# Altium PCB ETBC.PcbDoc
Units mil, origin at the board's own origin, x right, y up, seen from the top; angles counter-clockwise.
Board outline 2500 x 2500 mil, 4 copper layers (Top Copper, Plane (GND), Plane (+3V3), Bottom Copper), stack 61.811 mil thick; 104 components, 64 nets, 325 pads, 103 vias.
Unrouted connection lines stored in the file: 2.
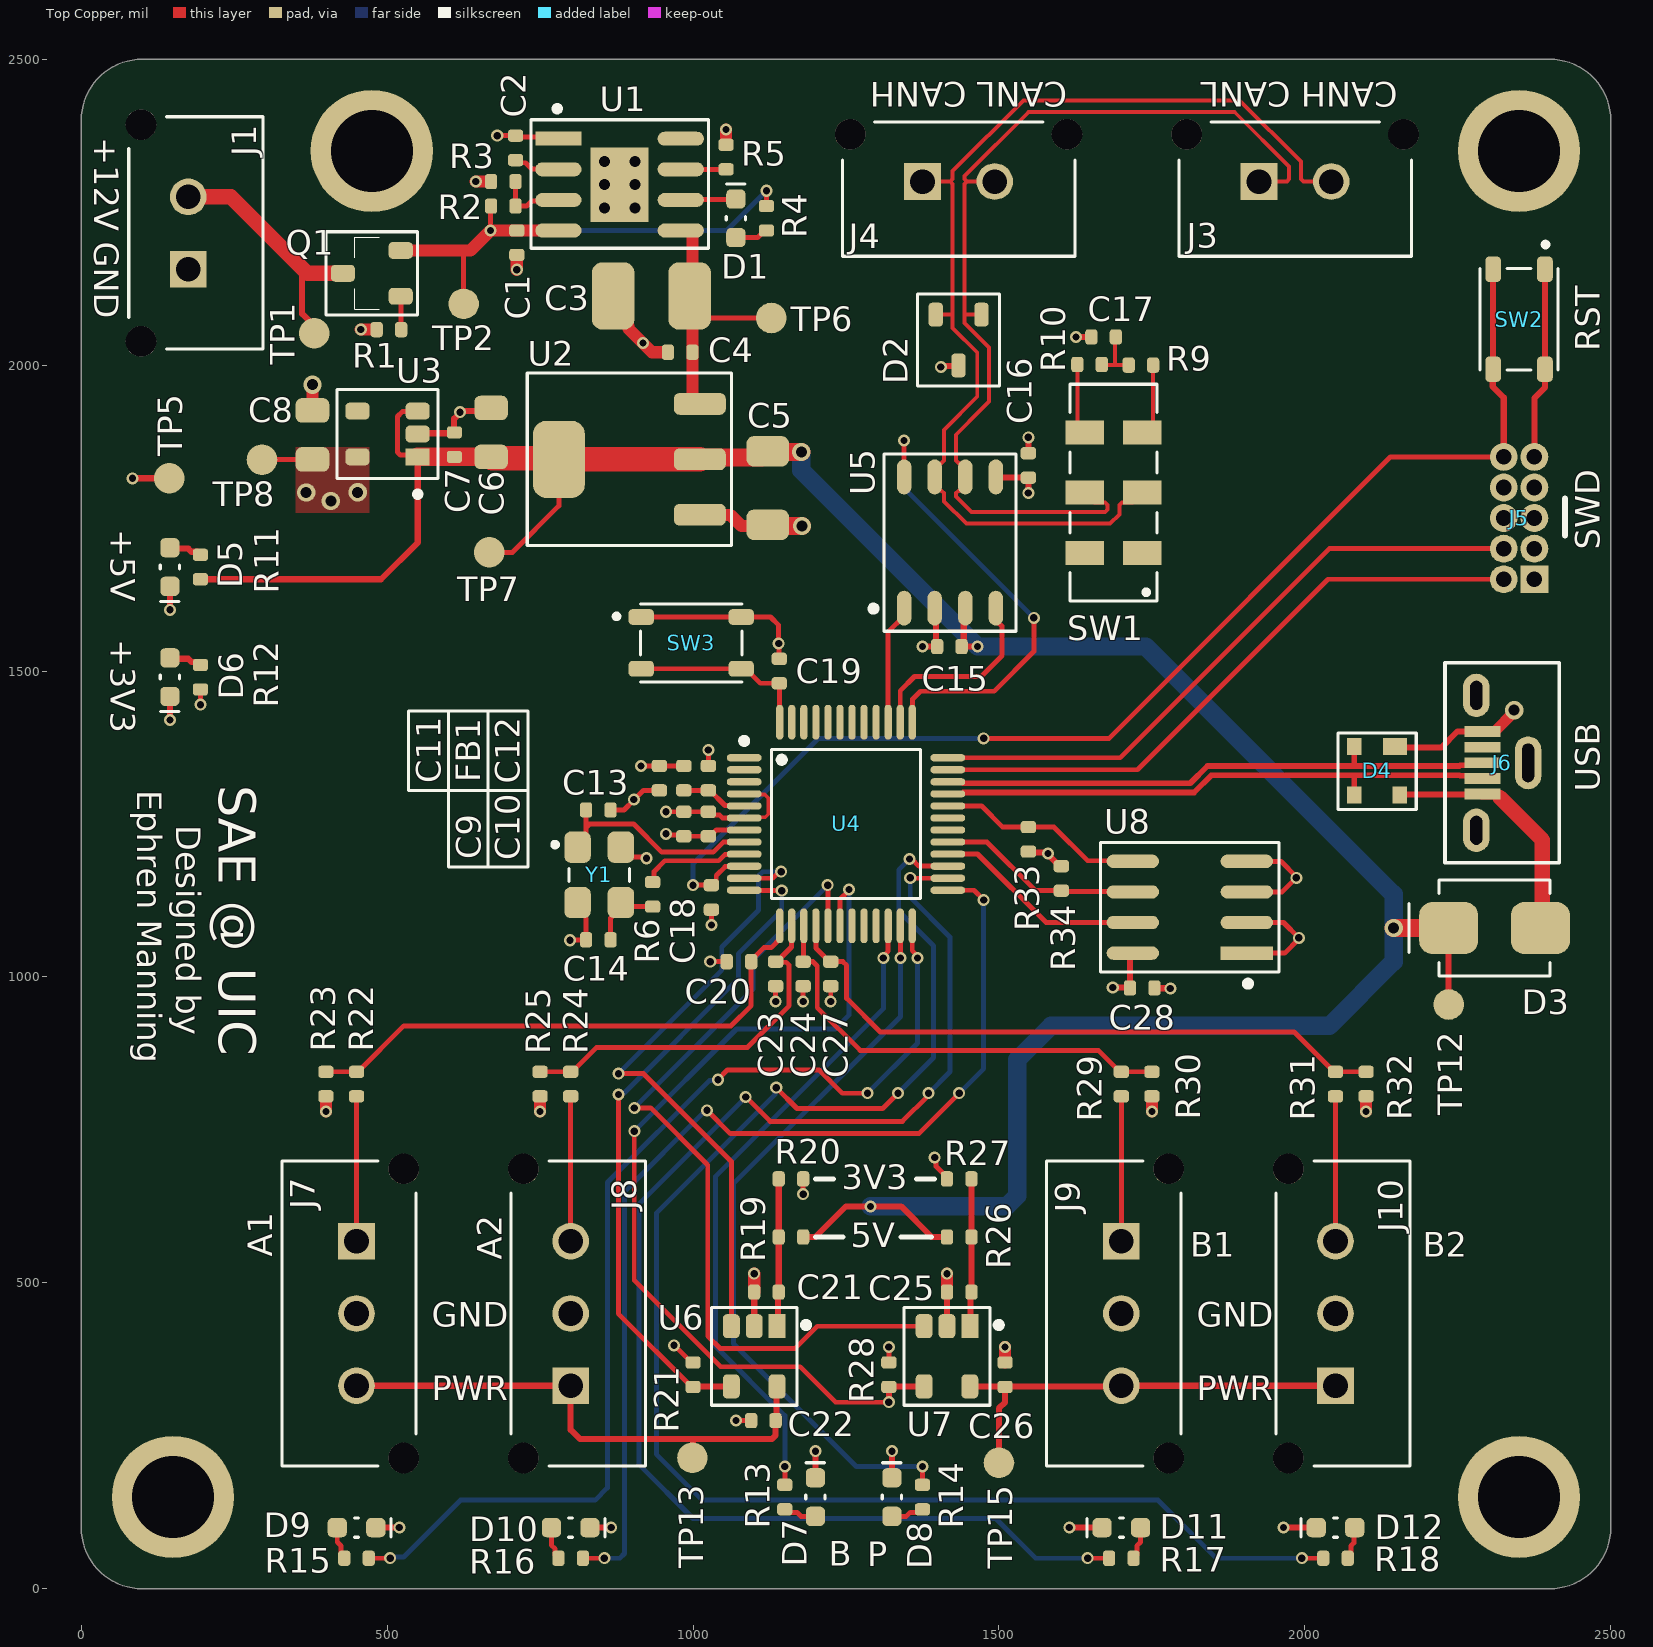
[diagram p0: Top Copper view]
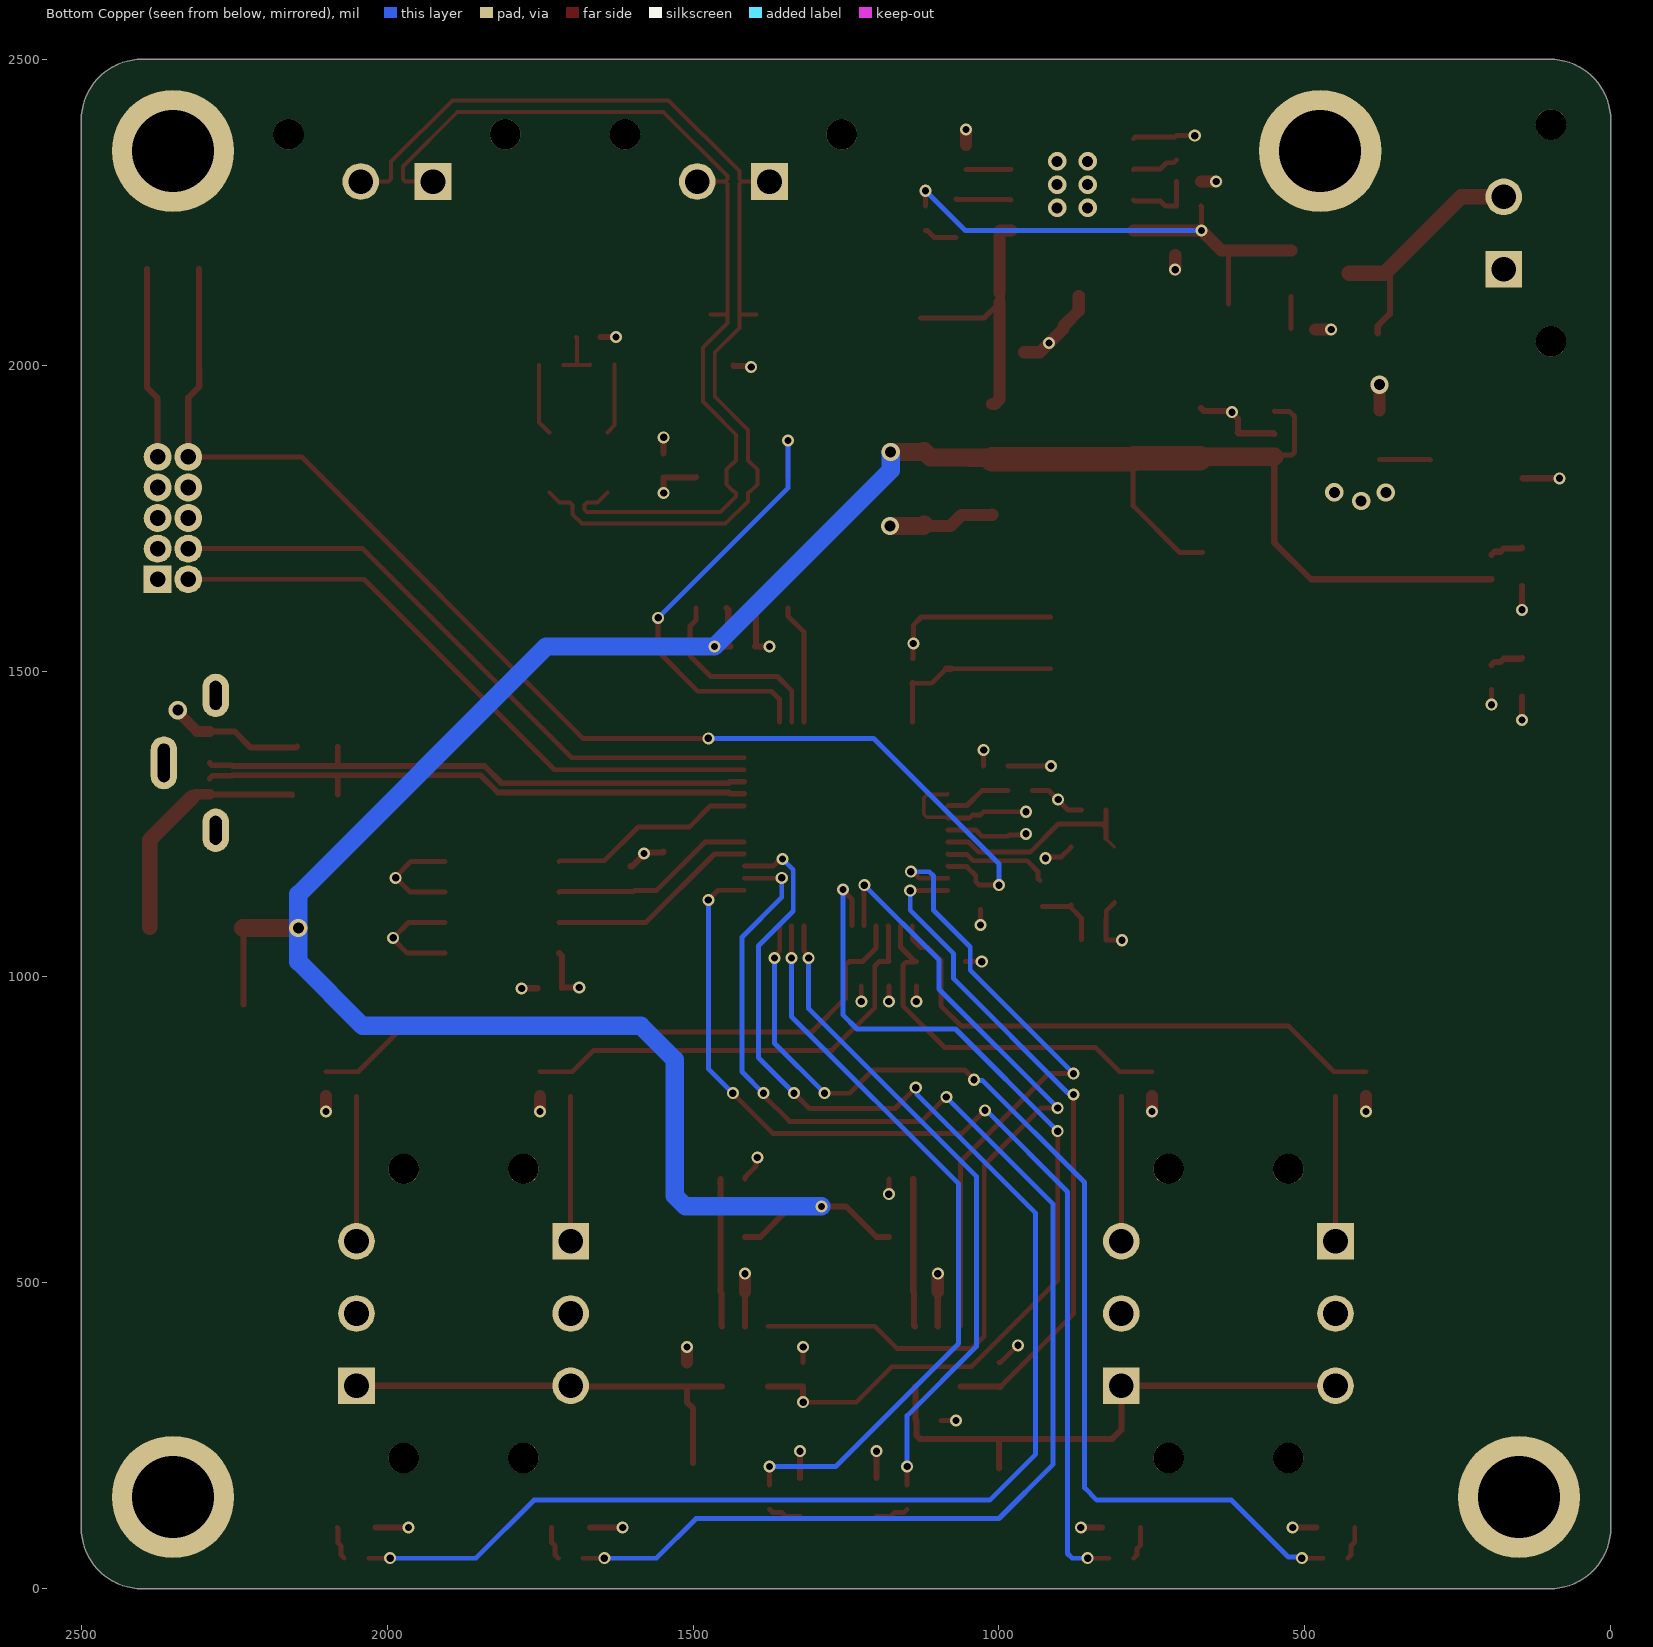
[diagram p1: Bottom Copper view, seen from below]
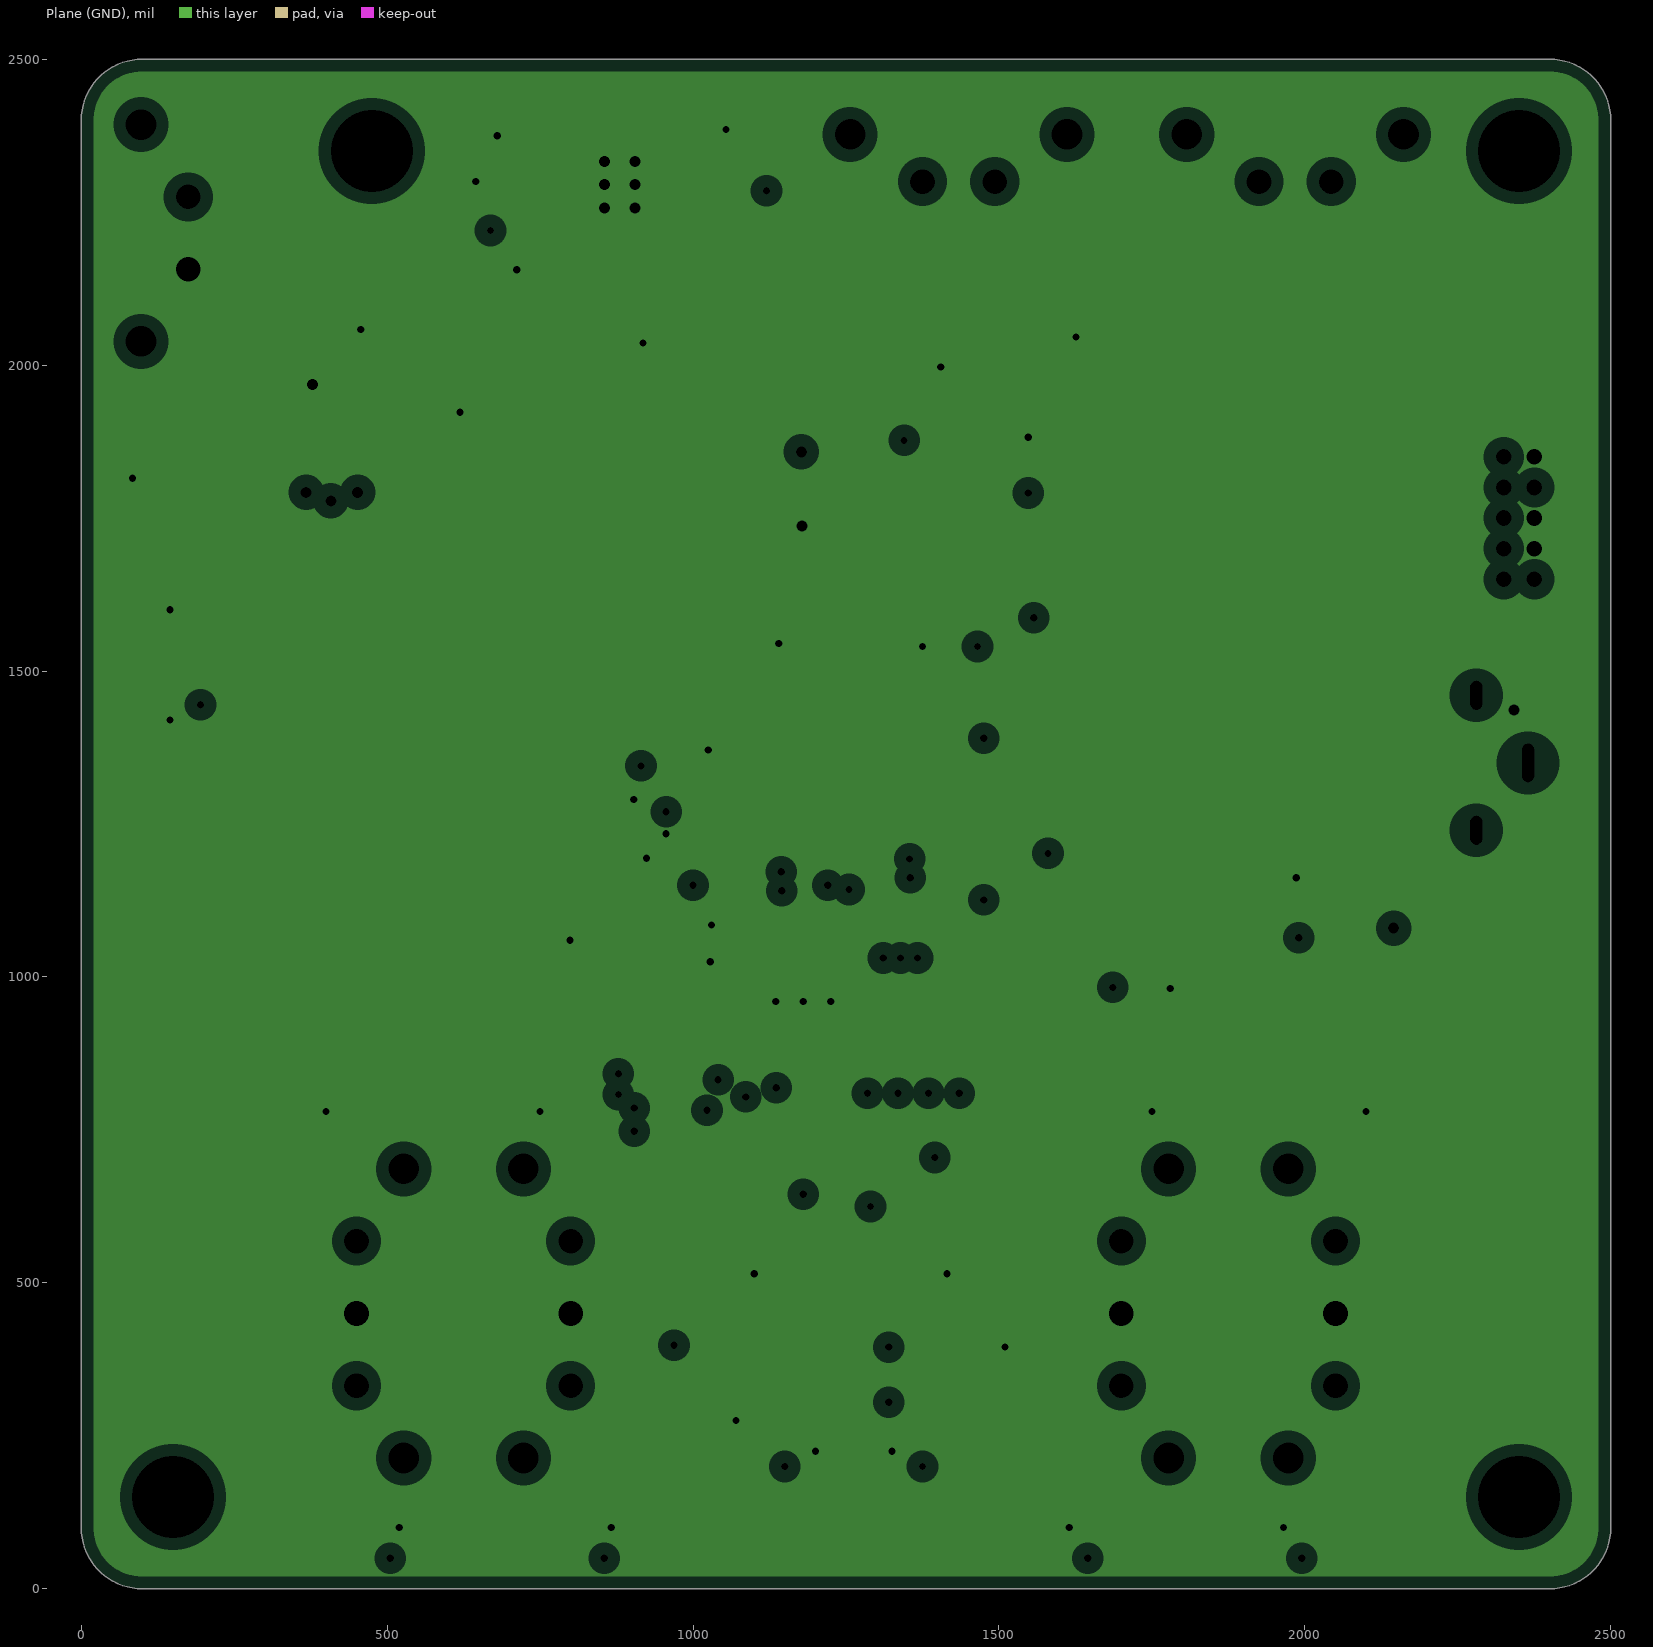
[diagram p2: Plane (GND), clearances drawn from the general rule]
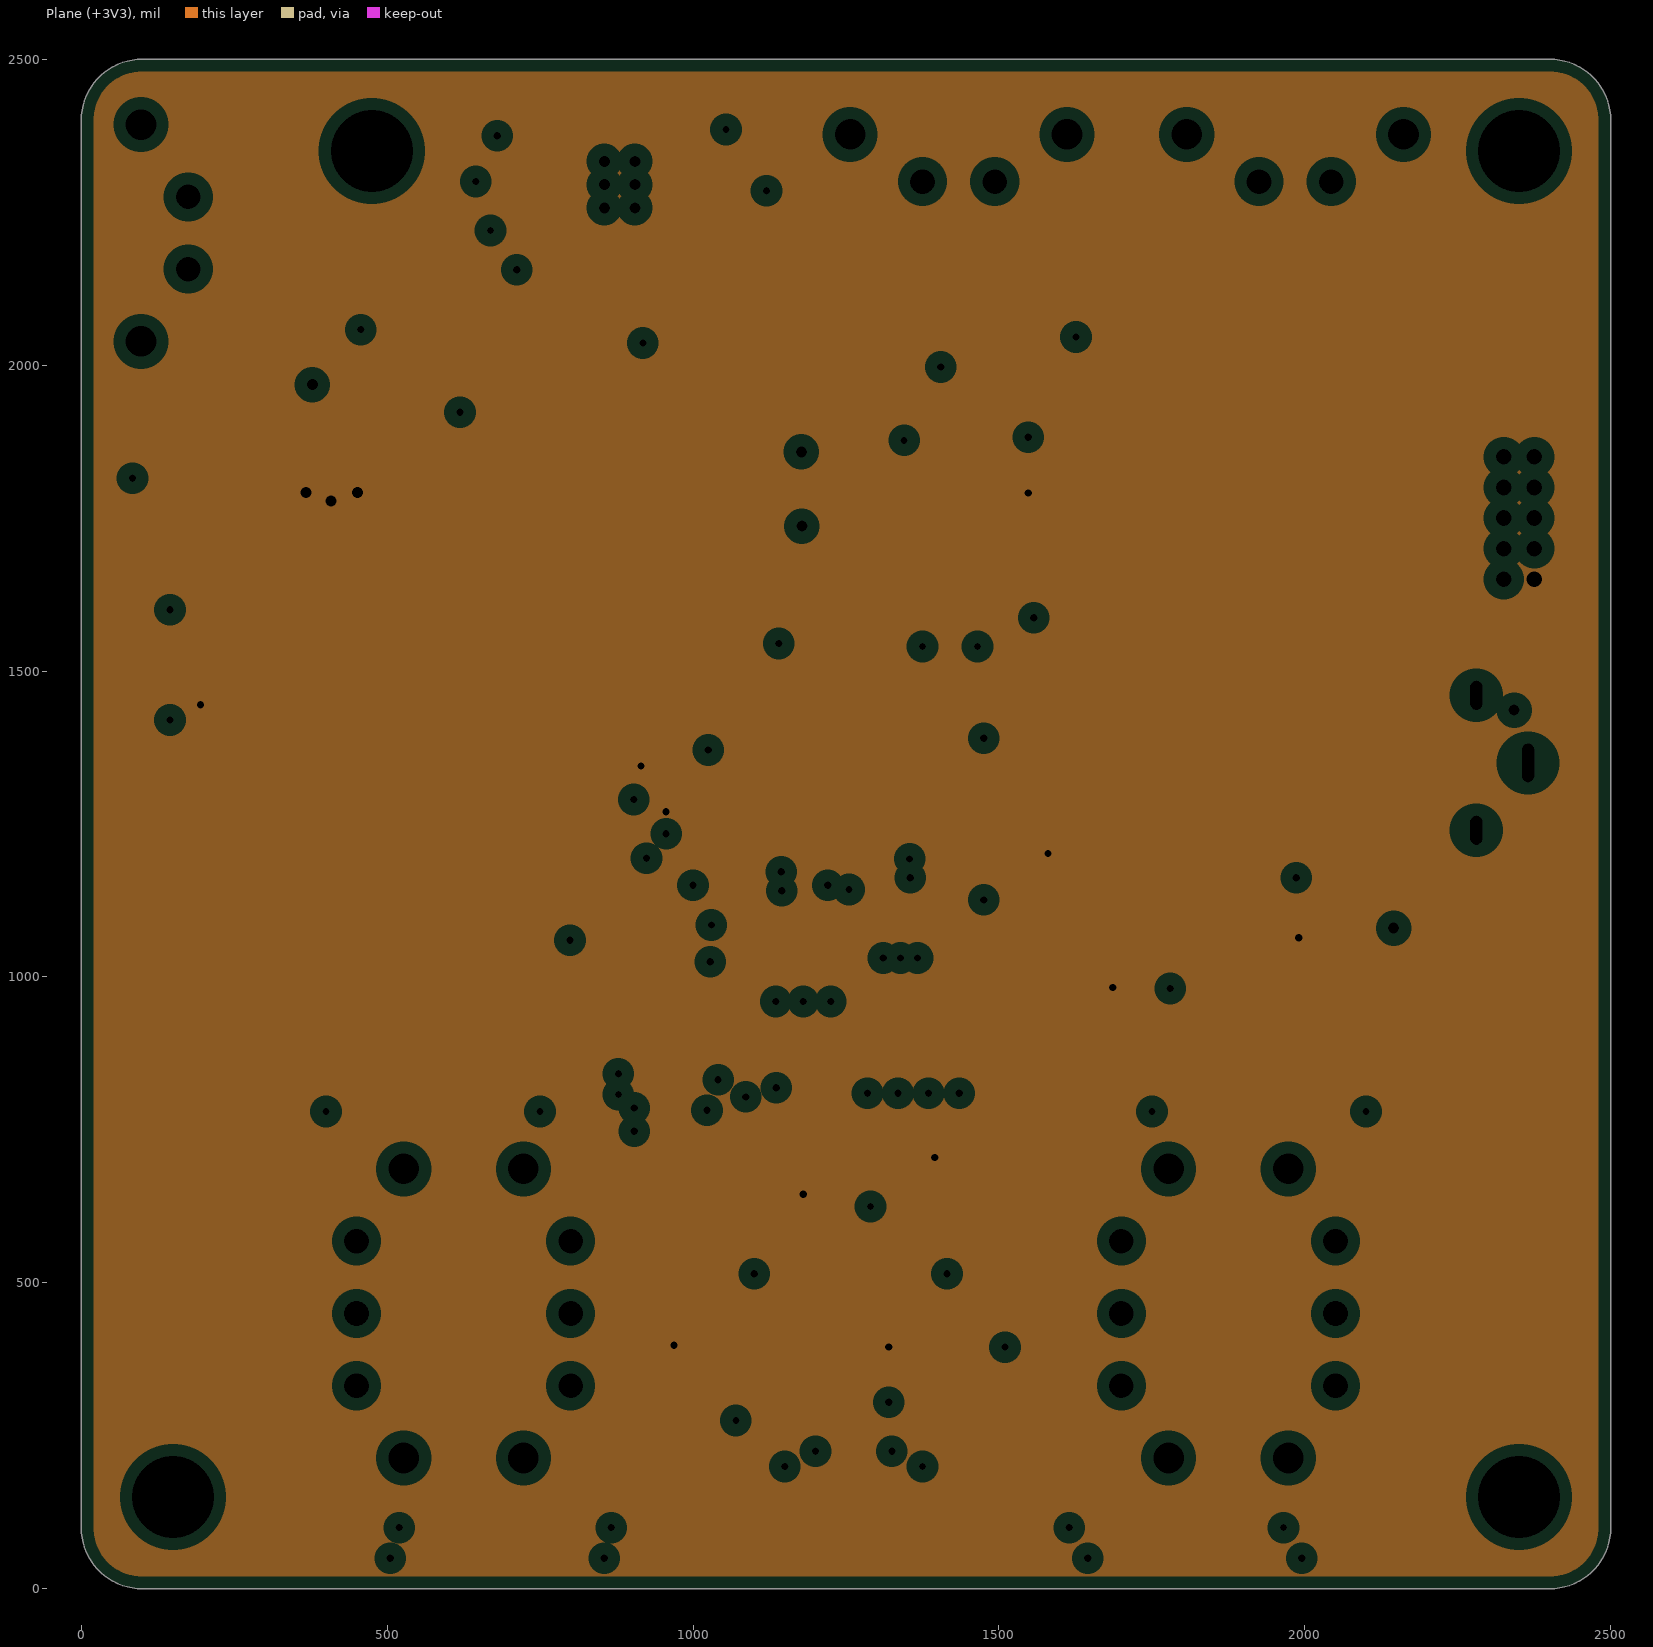
[diagram p3: Plane (+3V3), clearances drawn from the general rule]
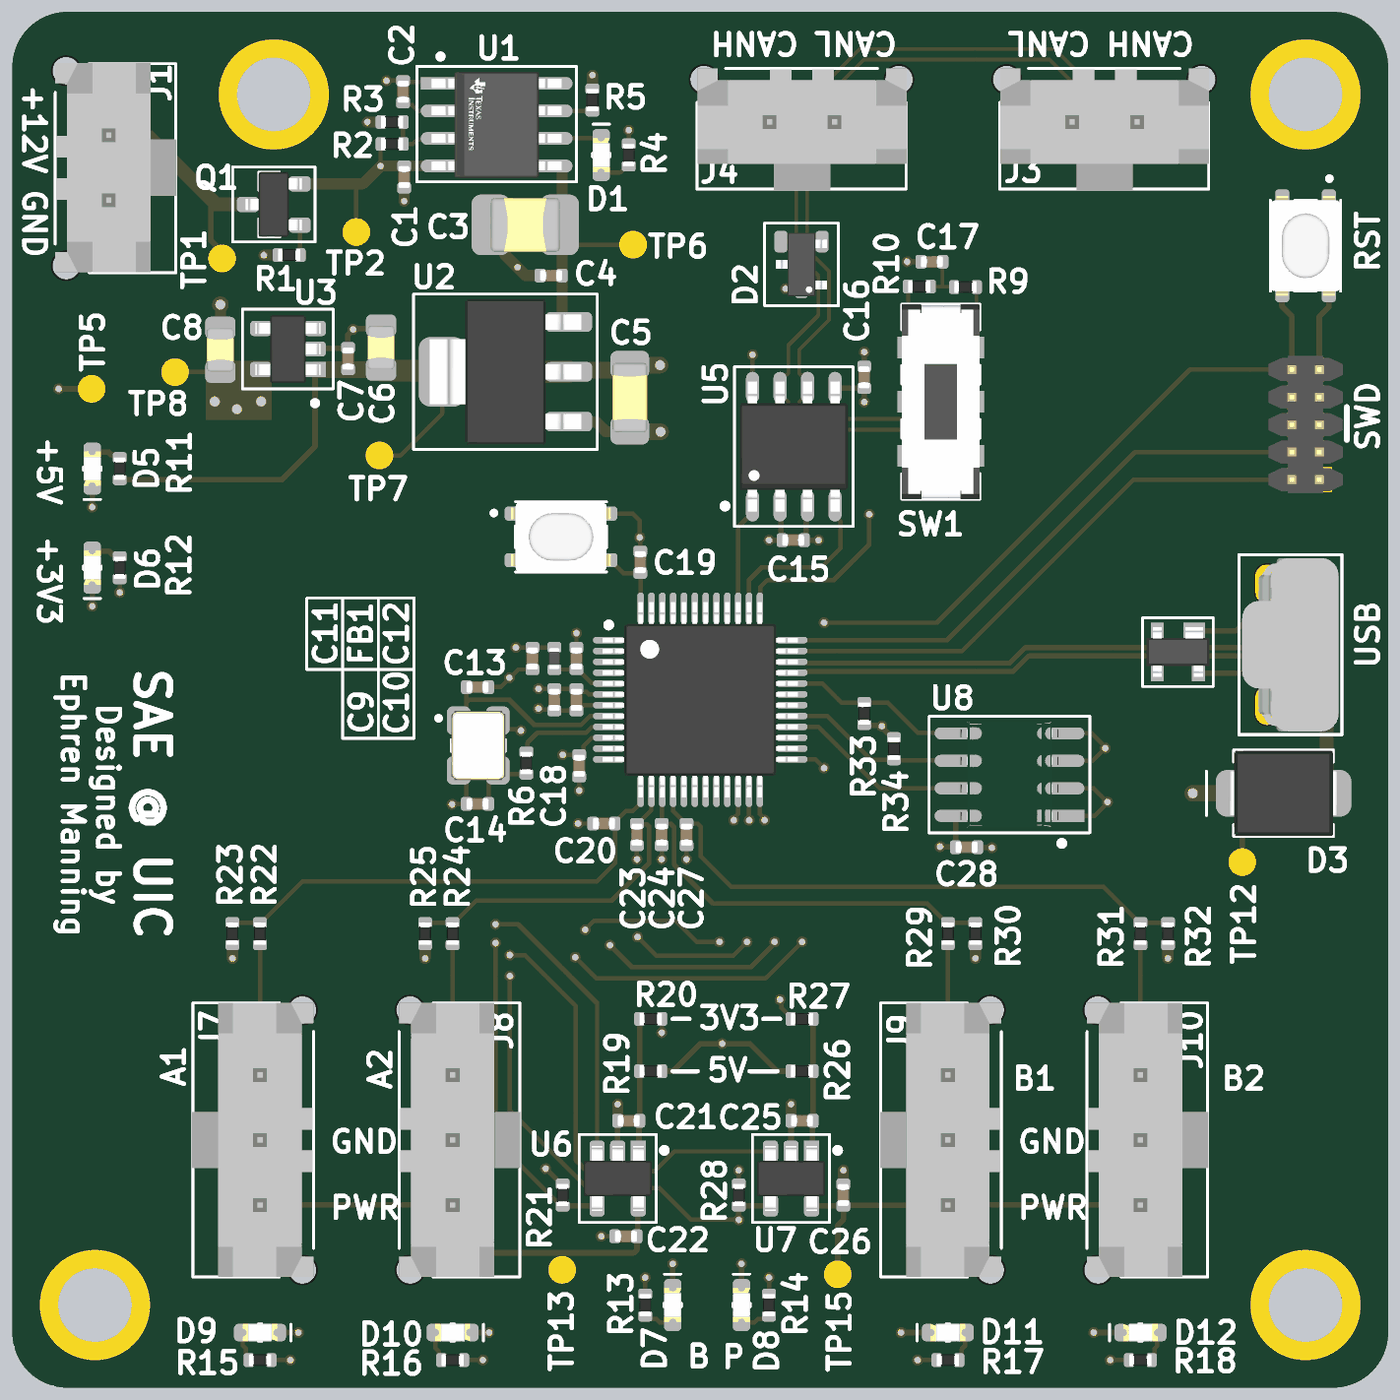
[diagram p4: 3D render of the assembled board from above, using the file's embedded part models]

## Layer stack, top to bottom
Top Mask: solder mask 0.591, Solder Resist, Dk 3.8
Top Copper: signal copper 1.378
Dielectric 1: prepreg 7.874, 7628, Dk 4.6
Plane (GND): plane copper 0.689, net GND
Core: core 41.929, FR-4, Dk 4.5
Plane (+3V3): plane copper 0.689, net +3V3
Dielectric 2: prepreg 7.874, 7628, Dk 4.6
Bottom Copper: signal copper 1.378
Bottom Mask: solder mask 0.591, Solder Resist, Dk 3.8

## Board outline
0,100 0,2400 cw(c100,2400) 100,2500 2400,2500 cw(c2400,2400) 2500,2400 2500,100 cw(c2400,100) 2400,0 100,0 cw(c100,100)

## Design rules (kind name [scope] priority, off if disabled: settings)
BoardOutlineClearance [All] p1: gap=7.87 ignorepadtopadclearanceinfootprint=FALSE except(15.75: Arc-SplitBarrior Arc-SplitContinuation Track-SplitBarrior Track-SplitContinuation SMDPad-SplitBarrior SMDPad-SplitContinuation THPad-SplitBarrior THPad-SplitContinuation Via-SplitBarrior Via-SplitContinuation Fill-SplitBarrior Fill-SplitContinuation Poly-SplitBarrior Poly-SplitContinuation Region-SplitBarrior Region-SplitContinuation Text-SplitBarrior Text-SplitContinuation)
Clearance [All] p1: gap=7.87 ignorepadtopadclearanceinfootprint=TRUE except(3.5: Arc-Arc Arc-Track Arc-SMDPad Track-Track Track-SMDPad SMDPad-SMDPad; 5: Arc-Via Track-Via SMDPad-Via THPad-Via Via-Via; 7: SMDPad-Fill SMDPad-Poly SMDPad-Region; 10: Arc-Text Track-Text SMDPad-Text THPad-Text Via-Text Fill-Text Poly-Text Region-Text Text-Text)
DiffPairsRouting DiffPairsRouting-USB [InDifferentialPair('USB')] p1: maxlimit=6 minlimit=6 mostfreqgap=6 toplayer_minwidth=9.23 toplayer_maxwidth=9.23 toplayer_prefwidth=9.23 bottomlayer_minwidth=9.23 bottomlayer_maxwidth=9.23 bottomlayer_prefwidth=9.23 impedanceprofiledriven=TRUE impedanceprofileid={FC7DA129-174D-4E2E-97C5-71684891E912} impedanceprofilevalue=90.000000 maxuncoupledlength=500
DiffPairsRouting DiffPairsRouting-CAN [InDifferentialPairClass('All Differential Pairs')] p2: maxlimit=13 minlimit=13 mostfreqgap=13 toplayer_minwidth=6.5 toplayer_maxwidth=6.5 toplayer_prefwidth=6.5 bottomlayer_minwidth=6.5 bottomlayer_maxwidth=6.5 bottomlayer_prefwidth=6.5 impedanceprofiledriven=TRUE impedanceprofileid={0DB70E09-E285-4EF7-9E2C-EFC48136A6BA} impedanceprofilevalue=120.000000 maxuncoupledlength=500
HoleSize [All] p1: absolutevalues=TRUE maxlimit=248.03 minlimit=7.87 maxpercent=80.000 minpercent=20.000
MinimumAnnularRing [All] p1: minimumring=3
MinimumSolderMaskSliver [All] p1 off: minsoldermaskwidth=3.94
PlaneClearance [All] p1: clearance=20
PlaneConnect [All] p1: planeconnectstyle=Direct reliefexpansion=20 reliefentries=4 reliefconductorwidth=10 reliefairgap=10
PolygonConnect PolygonConnect_1 [All] p1: connectstyle=Direct reliefconductorwidth=20 reliefentries=4 polygonreliefangle="90 Angle" airgapwidth=10
RoutingCorners [All] p1: cornerstyle=Round minsetback=100 maxsetback=100
RoutingVias [All] p1: holewidth=19.68 width=39.37 viastyle="Through Hole" minholewidth=7.87 minwidth=17.72 maxholewidth=39.37 maxwidth=78.74
SilkToSilkClearance [All] p1: silktosilkclearance=3.94
SilkToSolderMaskClearance [IsPad] p1: minsilkscreentomaskgap=3.94 clearancetoexposedcopper=TRUE
SolderMaskExpansion [All] p1: expansion=0 istentingtop=FALSE
SupplyNets "Schematic Supply Nets_6" [InNet('APPS_PWR')] p1: voltage=0.000
SupplyNets "Schematic Supply Nets_5" [InNet('VIN')] p2: voltage=0.000
SupplyNets "Schematic Supply Nets_4" [InNet('GND')] p3: voltage=0.000
SupplyNets "Schematic Supply Nets_3" [InNet('+3V3')] p4: voltage=0.000
SupplyNets "Schematic Supply Nets_2" [InNet('BSE_PWR')] p5: voltage=0.000
SupplyNets "Schematic Supply Nets_1" [InNet('+5V')] p6: voltage=0.000
SupplyNets "Schematic Supply Nets" [InNet('+12V')] p7: voltage=0.000
UnRoutedNet [All] p1: checkbadconnections=TRUE
Width [All] p1: maxlimit=150 minlimit=3.5 preferedwidth=15 minimp=50.000000 maximp=50.000000 favimp=50.000000
21 further rules are at their usual default settings.

## Classes and differential pairs
component class "User - LED Indicators": D5 D6 D7 D8 D9 D10 D11 D12 R11 R12 R13 R14 R15 R16 R17 R18
component class "User - Input": C18 C19 SW2 SW3
component class "Power - Regulation": C3 C4 C5 C6 C7 C8 TP6 TP7 TP8 U2 U3
component class "Power - Input": C1 C2 D1 J1 Q1 R1 R2 R3 R4 R5 TP1 TP2 TP5 U1
component class MCU: C9 C10 C11 C12 C13 C14 FB1 R6 U4 Y1
component class "Interface - EEPROM": C28 R33 R34 U8
component class "Interface - Debug": D3 D4 J5 J6 TP12
component class "Interface - CAN": C15 C16 C17 D2 J3 J4 R9 R10 SW1 U5
component class "Input - Pedals": C20 C21 C22 C23 C24 C25 C26 C27 J7 J8 J9 J10 R19 R20 R21 R22 R23 R24 R25 R26 R27 R28 R29 R30 R31 R32 TP13 TP15 U6 U7
differential pair USB: +USB_P -USB_N
differential pair CAN: +CAN_P -CAN_N

## Components (designator, comment, footprint, x,y, rotation, side; value= is the part's Value field where it differs from the comment)
C1 "4.7n/100V" CAP_0402-Footprint-1 712,2200 r90 top
C2 "3.3n" CAP_0402-Footprint-1 710,2355 r270 top
C3 "10u" CAP_1210-Footprint-1 932,2113 r0 top
C4 "4.7n" CAP_0402-Footprint-1 979,2021 r0 top
C5 "22u" CAP_1206-Footprint-1 1122,1799 r90 top
C6 "1u" CAP_0805-Footprint-1 670,1890 r270 top
C7 "4.7n" CAP_0402-Footprint-1 610,1870 r270 top
C8 "1u" CAP_0805-Footprint-1 378,1886 r270 top
C9 "4.7u" CAP_0402-Footprint-1 985,1250 r90 top
C10 "100n" CAP_0402-Footprint-1 1025,1250 r90 top
C11 "1u" CAP_0402-Footprint-1 945,1325 r90 top
C12 "100n" CAP_0402-Footprint-1 1025,1325 r270 top
C13 "16p" CAP_0402-Footprint-1 845.23,1272.93 r0 top
C14 "16p" CAP_0402-Footprint-1 845.23,1060.8 r0 top
C15 "100n" CAP_0402-Footprint-1 1419,1540 r0 top
C16 "100n" CAP_0402-Footprint-1 1548,1836 r270 top
C17 "4.7n/100V" CAP_0402-Footprint-1 1671,2046 r0 top
C18 "100n" CAP_0402-Footprint-1 1030,1130 r90 top
C19 "100n" CAP_0402-Footprint-1 1141,1500 r270 top
C20 "100n" CAP_0402-Footprint-1 1075,1025 r0 top
C21 "1u" CAP_0402-Footprint-1 1120,485 r0 top
C22 "1u" CAP_0402-Footprint-1 1115,275 r0 top
C23 "100n" CAP_0402-Footprint-1 1135,1005 r90 top
C24 "100n" CAP_0402-Footprint-1 1180,1005 r90 top
C25 "1u" CAP_0402-Footprint-1 1435,485 r0 top
C26 "1u" CAP_0402-Footprint-1 1510,350 r270 top
C27 "100n" CAP_0402-Footprint-1 1225,1005 r90 top
C28 "100n" CAP_0402-Footprint-1 1734,982 r180 top
D1 "150060RS75000" LED_150060RS75000 1070,2240 r270 top
D2 "ESD2CANFD24DBZRQ1" SOT95P237X112-3N 1434,2041 r270 top
D3 "LSM115JE3/TR13" DIOM4336X33N 2310,1080 r180 top
D4 "PRTR5V0U2X,215" SOT143B 2118,1337 r180 top
D5 "Green" Wurth-LED-0603-Footprint 145,1670 r90 top
D6 "Green" Wurth-LED-0603-Footprint 145,1490 r90 top
D7 "Yellow" Wurth-LED-0603-Footprint 1200,150 r270 top
D8 "Yellow" Wurth-LED-0603-Footprint 1325,150 r270 top
D9 "Red" LED_150060RS75000 450,100 r180 top
D10 "Red" LED_150060RS75000 800,100 r180 top
D11 "Red" LED_150060RS75000 1700,100 r0 top
D12 "Red" LED_150060RS75000 2050,100 r0 top
FB1 "600R" FB_0402-Footprint-1 985,1325 r270 top
J1 "Microfit 3.0" MOLEX_436500216 175,2156.89 r270 top
J3 "Microfit 3.0" MOLEX_436500216 1925,2300 r180 top
J4 "Microfit 3.0" MOLEX_436500216 1375,2300 r180 top
J5 "SWD Header" FCI_20021111-00010T4LF 2350,1750 r90 top
J6 "1051330001" MOLEX_1051330001 2322.48,1350 r90 top
J7 "Microfit 3.0" MOLEX_436500316 450,568.11 r90 top
J8 "Microfit 3.0" MOLEX_436500316 800,331.89 r270 top
J9 "Microfit 3.0" MOLEX_436500316 1700,568.11 r90 top
J10 "Microfit 3.0" MOLEX_436500316 2050,331.89 r270 top
Q1 "DMP3099L" SOT95P242X110-3N 475,2150 r180 top
R1 "750" RES_0402-Footprint-1 503,2058 r0 top
R2 "17.8k" RES_0402-Footprint-1 690,2260 r180 top
R3 "3.3k" RES_0402-Footprint-1 690,2300 r0 top
R4 "3.3k" RES_0402-Footprint-1 1120,2240 r270 top
R5 "3.3k" RES_0402-Footprint-1 1054,2340 r270 top
R6 "0R" RES_0402-Footprint-1 934,1135 r90 top
R9 "60R4" RES_0402-Footprint-1 1732,2000 r180 top
R10 "60R4" RES_0402-Footprint-1 1648,2001 r0 top
R11 "750" RES_0402-Footprint-1 195,1670 r90 top
R12 "330" RES_0402-Footprint-1 195,1490 r90 top
R13 "330" RES_0402-Footprint-1 1150,150 r270 top
R14 "330" RES_0402-Footprint-1 1375,150 r270 top
R15 "330" RES_0402-Footprint-1 450,50 r180 top
R16 "330" RES_0402-Footprint-1 800,50 r180 top
R17 "330" RES_0402-Footprint-1 1700,50 r0 top
R18 "330" RES_0402-Footprint-1 2050,50 r0 top
R19 "0" RES_0402-Footprint-1 1160,575 r180 top
R20 "0" RES_0402-Footprint-1 1160,670 r180 top
R21 "5.1k" RES_0402-Footprint-1 1000,350 r90 top
R22 "0" RES_0402-Footprint-1 450,825 r90 top
R23 "20k" RES_0402-Footprint-1 400,825 r90 top
R24 "2k" RES_0402-Footprint-1 800,825 r90 top
R25 "20k" RES_0402-Footprint-1 750,825 r90 top
R26 "0" RES_0402-Footprint-1 1435,575 r0 top
R27 "0" RES_0402-Footprint-1 1435,670 r0 top
R28 "5.1k" RES_0402-Footprint-1 1320,350 r90 top
R29 "0" RES_0402-Footprint-1 1700,825 r90 top
R30 "20k" RES_0402-Footprint-1 1750,825 r90 top
R31 "0" RES_0402-Footprint-1 2050,825 r90 top
R32 "20k" RES_0402-Footprint-1 2100,825 r90 top
R33 "3.3k" RES_0402-Footprint-1 1548,1225 r270 top
R34 "3.3k" RES_0402-Footprint-1 1602,1161 r90 top
SW1 "DPDT SW" SW_JS202011JCQN 1687.24,1791.57 r180 top
SW2 "PTS810_SJM_250_SMTR_LFS" SW_PTS810_SJM_250_SMTR_LFS 2350,2075 r270 top
SW3 "PTS810_SJM_250_SMTR_LFS" SW_PTS810_SJM_250_SMTR_LFS 997,1546 r0 top
TP1 "SMD Testpoint" "SMD Testpoint-Footprint-1" 381,2052 r90 top
TP2 "SMD Testpoint" "SMD Testpoint-Footprint-1" 625,2100 r90 top
TP5 "SMD Testpoint" "SMD Testpoint-Footprint-1" 144,1815 r180 top
TP6 "SMD Testpoint" "SMD Testpoint-Footprint-1" 1128,2077 r90 top
TP7 "SMD Testpoint" "SMD Testpoint-Footprint-1" 667,1694 r90 top
TP8 "SMD Testpoint" "SMD Testpoint-Footprint-1" 295.5,1845.5 r90 top
TP12 "SMD Testpoint" "SMD Testpoint-Footprint-1" 2235,955 r90 top
TP13 "SMD Testpoint" "SMD Testpoint-Footprint-1" 999,214 r90 top
TP15 "SMD Testpoint" "SMD Testpoint-Footprint-1" 1500,206 r90 top
U1 "TPS259621" FP-DDA0008E-IPC_B 880,2295 r0 top
U2 "AZ1117IH-5.0TRG1" SOT230P700X180-4N 896,1846 r180 top
U3 "NCV8163ASN330T1G" SOT95P275X110-5N 500.79,1887.4 r180 top
U4 "STM32G0B1CBT6" STM32G0-LQFP48 1250,1250 r0 top
U5 "TJA1051T/3, 118" SOIC127P600X175-8N 1420,1710 r90 top
U6 "MIC2090-2YM5-TR" SOT95P275X110-5N 1100,380 r270 top
U7 "MIC2090-2YM5-TR" SOT95P275X110-5N 1415,380 r270 top
U8 "M24C02-WMN6TP" FP-SO8N-SO-A-IPC_B 1812,1114 r180 top
Y1 "ECS-80-18-33-JGN-TR" XTAL_ECS-240-8-33-AGN-TR 846.65,1166.86 r270 top

## Footprints (in the part's own frame and the unit in brackets; to place one, negate y for a bottom-side part, rotate by r counter-clockwise, add the part's x,y. Pads: shape width x height; smd on the part's side, far side on the other; paste and mask are expansions set on the pad)
CAP_0402-Footprint-1 [mil]
  rrect50% 20x25 smd: 1(-20,0) 2(20,0)
  body extent -21,-11 21,11, height 22
CAP_0805-Footprint-1 [mil]
  rrect50% 40x55 smd: 1(-40,0) 2(40,0)
  body extent -39,-25 39,25, height 50
CAP_1206-Footprint-1 [mil]
  rrect50% 50x70 smd: 1(-60,0) 2(60,0)
  body extent -63,-31 63,31, height 64
CAP_1210-Footprint-1 [mil]
  rrect50% 70x110 smd: 1(-62.5,0) 2(62.5,0)
  body extent -63,-49 63,49, height 80
DIOM4336X33N [mm] "Molded Diode, 2-Leads, Body 4.31x3.62mm, IPC Medium Density"
  rrect50% 2.45x2.15 smd: 1(-1.905,0) 2(1.905,0)
  silkscreen extent -2.3,-2 3.56,2, body extent -2.5,-1.97 2.5,1.97, height 3.3
FB_0402-Footprint-1 [mil]
  rrect50% 20x25 smd: 1(-20,0) 2(20,0)
  body extent -20,-10 20,10, height 20
FCI_20021111-00010T4LF [mm]
  rect 1.158x1.158 hole 0.65: 1(-2.54,-0.635)
  round 1.158 hole 0.65: 2(-2.54,0.635) 3(-1.27,-0.635) 4(-1.27,0.635) 5(0,-0.635) 6(0,0.635) 7(1.27,-0.635) 8(1.27,0.635) 9(2.54,-0.635) 10(2.54,0.635)
  silkscreen extent -0.71,-1.91 0.81,-1.91, body extent -3.17,-1.72 3.17,1.72, height 5.56
FP-DDA0008E-IPC_B [mm]
  rect 1.92x0.582 smd paste+0 mask+0: 1(-2.54,1.905)
  rrect100% 1.92x0.582 smd paste+0 mask+0: 2(-2.54,0.635) 3(-2.54,-0.635) 4(-2.54,-1.905) 5(2.54,-1.905) 6(2.54,-0.635) 7(2.54,0.635) 8(2.54,1.905)
  rect 2.4x3.1 smd paste-1000 mask+0: 9(0,0)
  body extent -3.7,-2.7 3.7,2.7, height 0.25
FP-SO8N-SO-A-IPC_B [mil]
  rect 85.59x21.74 smd paste+0 mask+0: 1(-93.15,75)
  rrect100% 85.59x21.74 smd paste+0 mask+0: 2(-93.15,25) 3(-93.15,-25) 4(-93.15,-75) 5(93.15,-75) 6(93.15,-25) 7(93.15,25) 8(93.15,75)
  silkscreen extent -100,120 -90,130, body extent -146,-106 146,106, height 10
LED_150060RS75000 [mm]
  rrect50% 0.8x0.8 smd: A(0.8,0) C(-0.8,0)
  silkscreen extent -1.42,-0.4 0.08,0.4, body extent -0.8,-0.4 0.8,0.4, height 0.81
MOLEX_436500216 [mm]
  rect 1.52x1.52 / inner round 1.52 / far side rect 1.52x1.52 hole 1.02 mask+0.076: 1(0,0)
  round 1.52 hole 1.02 mask+0.076: 2(-3,0)
  round 1.27 hole 1.27 unplated mask+0.076: ""(-6,-1.96) ""(3,-1.96)
  silkscreen extent -6.32,-2.47 3.32,3.1, body extent -6.35,-2.47 3.3,3.14, height 9.91
MOLEX_436500316 [mm]
  rect 1.52x1.52 / inner round 1.52 / far side rect 1.52x1.52 hole 1.02 mask+0.076: 1(0,0)
  round 1.52 hole 1.02 mask+0.076: 2(-3,0) 3(-6,0)
  round 1.27 hole 1.27 unplated mask+0.076: ""(-9,-1.96) ""(3,-1.96)
  silkscreen extent -9.33,-2.47 3.32,3.1, body extent -9.32,-2.47 3.32,3.14, height 9.91
MOLEX_1051330001 [mm]
  rect 0.448x1.5 smd: 1(-1.3,0.825) 2(-0.65,0.825) 3(0,0.825) 4(0.65,0.825) 5(1.3,0.825)
  oval 1.8x1.1 hole 0.5 slot 1.2 at 0 deg mask+0.064: SH1(-2.8,1.075) SH3(2.8,1.075)
  oval 2.2x1.1 hole 0.5 slot 1.6 at 0 deg mask+0.064: SH2(0,-1.075)
  silkscreen extent -4.15,-2.37 4.15,2.38, body extent -4,-2.22 4,2.22, height 7.51
RES_0402-Footprint-1 [mil]
  rrect50% 20x25 smd: 1(-20,0) 2(20,0)
  body extent -21,-11 21,11, height 16
"SMD Testpoint-Footprint-1" [mil]
  round 50 smd paste-99999: 1(0,0)
  silkscreen extent -427,-1364 -419,-1356
SOIC127P600X175-8N [mm] "SOIC, 8-Leads, Body 4.90x3.90mm, Pitch 1.27mm, IPC Medium Density"
  oval 1.45x0.6 smd: 1(-2.725,1.905) 2(-2.725,0.635) 3(-2.725,-0.635) 4(-2.725,-1.905) 5(2.725,-1.905) 6(2.725,-0.635) 7(2.725,0.635) 8(2.725,1.905)
  silkscreen extent -2.87,3.05 -2.62,3.3, body extent -3,-2.5 3,2.5, height 1.75
SOT95P237X112-3N [mm]
  rrect50% 0.986x0.59 smd: 1(-1.055,0.95) 2(-1.055,-0.95) 3(1.055,0)
  body extent -1.18,-1.46 1.19,1.46, height 1.12
SOT95P242X110-3N [mm] "SOT23, 3-Leads, Body 2.90x2.42mm, Pitch 0.95mm, IPC Medium Density"
  rrect50% 1x0.7 smd: 1(-1.2,0.95) 2(-1.2,-0.95) 3(1.2,0)
  silkscreen extent -0.3,-1.5 0.7,1.5, body extent -1.3,-1.5 1.3,1.5, height 1.1
SOT95P275X110-5N [mm] "SOT23, 5-Leads, Body 3.00x2.75mm, Pitch 0.95mm, IPC Medium Density"
  rect 1x0.7 smd: 1(-1.25,0.95)
  rrect50% 1x0.7 smd: 2(-1.25,0) 3(-1.25,-0.95) 4(1.25,-0.95) 5(1.25,0.95)
  body extent -1.5,-1.58 1.5,1.58, height 1.1
SOT143B [mm]
  rect 1x0.7 smd: 1(-0.75,-1)
  rect 0.6x0.7 smd: 2(0.95,-1) 3(0.95,1) 4(-0.95,1)
  body extent -1.45,-1.15 1.45,1.15, height 1.11
SOT230P700X180-4N [mm] "SOT223, 4-Leads, Body 6.50x7.00mm (avg), Pitch 2.30mm, IPC Medium Density"
  rrect50% 2.15x0.9 smd: 1(-2.925,2.3) 2(-2.925,0) 3(-2.925,-2.3)
  rrect50% 2.15x3.2 smd: 4(2.925,0)
  body extent -3.5,-3.35 3.5,3.35, height 1.8
STM32G0-LQFP48 [mm] "LQFP, 48-Leads, Body 7.00x7.00mm, Pitch 0.50mm, IPC Medium Density"
  oval 1.45x0.3 smd: 1(-4.225,2.75) 2(-4.225,2.25) 3(-4.225,1.75) 4(-4.225,1.25) 5(-4.225,0.75) 6(-4.225,0.25) 7(-4.225,-0.25) 8(-4.225,-0.75) 9(-4.225,-1.25) 10(-4.225,-1.75) 11(-4.225,-2.25) 12(-4.225,-2.75) 25(4.225,-2.75) 26(4.225,-2.25) 27(4.225,-1.75) 28(4.225,-1.25) 29(4.225,-0.75) 30(4.225,-0.25) 31(4.225,0.25) 32(4.225,0.75) 33(4.225,1.25) 34(4.225,1.75) 35(4.225,2.25) 36(4.225,2.75)
  oval 0.3x1.45 smd: 13(-2.75,-4.225) 14(-2.25,-4.225) 15(-1.75,-4.225) 16(-1.25,-4.225) 17(-0.75,-4.225) 18(-0.25,-4.225) 19(0.25,-4.225) 20(0.75,-4.225) 21(1.25,-4.225) 22(1.75,-4.225) 23(2.25,-4.225) 24(2.75,-4.225) 37(2.75,4.225) 38(2.25,4.225) 39(1.75,4.225) 40(1.25,4.225) 41(0.75,4.225) 42(0.25,4.225) 43(-0.25,4.225) 44(-0.75,4.225) 45(-1.25,4.225) 46(-1.75,4.225) 47(-2.25,4.225) 48(-2.75,4.225)
  silkscreen extent -4.35,-3.1 3.1,3.57, body extent -4.5,-4.5 4.5,4.5, height 1.6
SW_JS202011JCQN [mm]
  rect 1.6x1 smd: 1(-1.2,2.5) 2(-1.2,0) 3(-1.2,-2.5) 5(1.2,2.5) 6(1.2,0) 7(1.2,-2.5)
  silkscreen extent -1.8,-4.5 1.8,4.5, body extent -1.8,-4.5 1.8,4.5, height 5.61
SW_PTS810_SJM_250_SMTR_LFS [mm]
  rrect50% 1.05x0.65 smd: 1(-2.075,1.075) 2(2.075,1.075) 3(-2.075,-1.075) 4(2.075,-1.075)
  silkscreen extent -3.2,-1.62 2.1,1.62, body extent -2.3,-1.6 2.3,1.6, height 2.71
Wurth-LED-0603-Footprint [mm]
  rrect50% 0.8x0.8 smd: A(0.8,0) C(-0.8,0)
  silkscreen extent -1.42,-0.4 0.08,0.4, body extent -0.8,-0.4 0.8,0.4, height 0.81
XTAL_ECS-240-8-33-AGN-TR [mm]
  rrect50% 1.3x1.1 smd: 1(-1.15,-0.9) 2(1.15,-0.9) 3(1.15,0.9) 4(-1.15,0.9)
  silkscreen extent -1.36,-1.93 0.27,1.25, body extent -1.6,-1.25 1.6,1.25, height 0.8

## Part data
C1 C4 C7 C17: library part CMP-00072-1, "4.7nF 100V 10% 0402 Ceramic Capacitor", Digikey Part Number=490-4765-1-ND, Manufacturer 1="Murata Electronics", Manufacturer Part Number 1=GCM155R72A472KA37D
C2: library part CMP-00088-1, "3.3nF 25V 0402 Ceramic Capacitor", Digikey Part Number=311-3623-1-ND, Manufacturer 1=YAGEO, Manufacturer Part Number 1=CC0402KRX7R8BB332
C3: library part CMP-00102-1, "10uF 35V 10% 1210 MLCC", Digikey Part Number=1276-3389-1-ND, Manufacturer 1="Samsung Electro-Mechanics", Manufacturer Part Number 1=CL32B106KLJNNNE
C5: library part CMP-00099-3, "22uF 10V 20% 1206 MLCC", Digikey Part Number=1276-3148-1-ND, Manufacturer 1="Samsung Electro-Mechanics", Manufacturer Part Number 1=CL31B226MPHNNNE
C6 C8: library part CMP-00097-2, "1uF 25V 10% 0805 MLCC", Digikey Part Number=1276-1066-1-ND, Manufacturer 1="Samsung Electro-Mechanics", Manufacturer Part Number 1=CL21B105KAFNNNE
C9: library part CMP-00067-3, "4.7uF 10V 20% 0402 CAP", Digikey Part Number=1276-1482-1-ND, Manufacturer 1="Samsung Electro-Mechanics", Manufacturer Part Number 1=CL05A475MP5NRNC
C10 C12 C15 C16 C18 C19 C20 C23 C24 C27 C28: library part CMP-00066-3, "100nF 10V 10% 0402 CAP", Digikey Part Number=1276-1002-1-ND, Manufacturer 1="Samsung Electro-Mechanics", Manufacturer Part Number 1=CL05B104KP5NNNC
C11 C21 C22 C25 C26: library part CMP-00068-3, "1uF 10V 10% 0402 CAP", Digikey Part Number=1276-1076-1-ND, Manufacturer 1="Samsung Electro-Mechanics", Manufacturer Part Number 1=CL05A105KP5NNNC
C13 C14: library part CMP-00065-1, "16pF 50V 1% 0402 Ceramic Capacitor", Digikey Part Number=490-GJM1555C1H160FB01JCT-ND, Manufacturer 1="Murata Electronics", Manufacturer Part Number 1=GJM1555C1H160FB01J
D1: library part CMP-120-000000-3, "CLEAR RED LEAD 0603 2V Forward Voltage", Digikey Part Number=732-4978-1-ND, Manufacturer 1="Würth Elektronik", Manufacturer Part Number 1=150060RS75000
D2: library part CMP-112-000000-3, "Dual TVS Protection Diodes", Digikey Part Number=296-ESD2CANFD24DBZRQ1CT-ND, Manufacturer 1="Texas Instruments", Manufacturer Part Number 1=ESD2CANFD24DBZRQ1
D3: library part CMP-00073-1, "15V 1A Schottky Diode, Very Low Forward Voltage", Digikey Part Number=150-LSM115JE3/TR13CT-ND, Manufacturer 1="Microchip Technology", Manufacturer Part Number 1=LSM115JE3/TR13
D4: library part CMP-018-000000-5, "Diode Array, ESD", Digikey Part Number=1727-3884-1-ND, Manufacturer 1="Nexperia USA Inc.", Manufacturer Part Number 1=PRTR5V0U2X,215
D5 D6: library part CMP-00076-2, "LED GREEN CLEAR 0603 2V Forward Voltage", Digikey Part Number=732-4980-1-ND, Manufacturer 1="Würth Elektronik", Manufacturer Part Number 1=150060VS75000
D7 D8: library part CMP-00077-1, "LED YELLOW CLEAR 0603 2V Forward Voltage", Digikey Part Number=732-4981-1-ND, Manufacturer 1="Würth Elektronik", Manufacturer Part Number 1=150060YS75000
D9 D10 D11 D12: library part CMP-120-000000-3, "CLEAR RED LEAD 0603 2V Forward Voltage", Digikey Part Number=732-4978-1-ND, Manufacturer 1="Würth Elektronik", Manufacturer Part Number 1=150060RS75000
FB1: library part CMP-00069-1, "600R@100MHz 300mA 0402 Ferrite Bead", Digikey Part Number=490-1006-1-ND, Manufacturer 1="Murata Electronics", Manufacturer Part Number 1=BLM15AG601SN1D
J1 J3 J4: library part CMP-085-000002-2, "1x2 Gold Microfit", Digikey Part Number=WM1922-ND, Manufacturer 1=Molex, Manufacturer Part Number 1=43650-0216
J5: library part CMP-118-000000-2, "SWD Unshrouded Connector", Digikey Part Number=609-3712-ND, Manufacturer 1="Amphenol ICC (FCI)", Manufacturer Part Number 1=20021111-00010T4LF
J6: library part CMP-016-000000-6, "Micro USB Type B 90 Degree Conn", Digikey Part Number=WM9734CT-ND, Manufacturer 1=Molex, Manufacturer Part Number 1=1051330001
J7 J8 J9 J10: library part CMP-085-000001-2, "1x3 Gold Microfit", Digikey Part Number=WM1923-ND, Manufacturer 1=Molex, Manufacturer Part Number 1=436500316
Q1: library part CMP-00025-2, "Mosfet P-CH 30V 3.8A Vgs(ON) = -10V SOT23", Digikey Part Number=DMP3099L-7DICT-ND, Manufacturer 1="Diodes Incorporated", Manufacturer Part Number 1=DMP3099L-7
R1 R11: library part CMP-00078-1, "750 1% 1/16W 0402 Thick Film", Digikey Part Number=311-750LRCT-ND, Manufacturer 1=YAGEO, Manufacturer Part Number 1=RC0402FR-07750RL
R2: library part CMP-00090-1, "17.8k 1% 1/16W 0402 Thick Film", Digikey Part Number=YAG3012CT-ND, Manufacturer 1=YAGEO, Manufacturer Part Number 1=RC0402FR-0717K8L
R3 R4 R5 R33 R34: library part CMP-00091-1, "3.3k 1% 1/16W 0402 Thick Film", Digikey Part Number=311-3.30KLRCT-ND, Manufacturer 1=YAGEO, Manufacturer Part Number 1=RC0402FR-073K3L
R6 R19 R20 R22 R26 R27 R29 R31: library part CMP-00070-1, "0 Ohm 1/16W 0402 Resistor", Digikey Part Number=311-0.0JRCT-ND, Manufacturer 1=YAGEO, Manufacturer Part Number 1=RC0402JR-070RL
R9 R10: library part CMP-00071-1, "60.4 Ohm 1% 1/16W 0402 Resistor", Digikey Part Number=311-60.4LRCT-ND, Manufacturer 1=YAGEO, Manufacturer Part Number 1=RC0402FR-0760R4L
R12 R13 R14 R15 R16 R17 R18: library part CMP-00079-1, "330 1% 1/16W 0402 Thick Film", Digikey Part Number=311-330LRCT-ND, Manufacturer 1=YAGEO, Manufacturer Part Number 1=RC0402FR-07330RL
R21 R28: library part CMP-00074-1, "5.1k 1% 1/16W 0402 Resistor", Digikey Part Number=311-5.10KLRCT-ND, Manufacturer 1=YAGEO, Manufacturer Part Number 1=RC0402FR-075K1L
R23 R25 R30 R32: library part CMP-00081-1, "20k 0.1% 1/16W 0402 Thin Film", Digikey Part Number=YAG1388CT-ND, Manufacturer 1=YAGEO, Manufacturer Part Number 1=RT0402BRD0720KL
R24: library part CMP-00080-1, "2k 0.1% 1/16W 0402 Thin Film", Digikey Part Number=YAG2303CT-ND, Manufacturer 1=YAGEO, Manufacturer Part Number 1=RT0402BRD072KL
SW1: library part CMP-114-000000-2, "DPDT SMD SWITCH 6V 300MA", Digikey Part Number=CKN10723CT-ND, Manufacturer 1=C&K, Manufacturer Part Number 1=JS202011JCQN
SW2 SW3: library part CMP-014-000000-4, "Tactile Switch SPST-NO Top Actuated Surface Mount", Digikey Part Number=CKN10502CT-ND, Manufacturer 1=C&K, Manufacturer Part Number 1="PTS810 SJM 250 SMTR LFS"
TP1 TP2 TP5 TP6 TP7 TP8 TP12 TP13 TP15: library part CMP-00095-4, "Flat 50x50mil Test Point"
U1: library part CMP-00086-2, "19V 2A EFUSE", Digikey Part Number=296-TPS259621DDATCT-ND, Manufacturer 1="Texas Instruments", Manufacturer Part Number 1=TPS259621DDAT
U2: library part CMP-00103-1, "5V Fixed Linear Regulator", Digikey Part Number=AZ1117IH-5.0TRG1DICT-ND, Manufacturer 1="Diodes Incorporated", Manufacturer Part Number1=AZ1117IH-5.0TRG1
U3: library part CMP-00082-1, "3.3V LDO, Ultra Low Noise 5.5V Max Vin", Digikey Part Number=NCV8163ASN330T1GOSCT-ND, Manufacturer 1=onsemi, Manufacturer Part Number 1=NCV8163ASN330T1G
U4: library part CMP-00062-7, "32-bit Cortex-M0+ MCU 48LQFP", Digikey Part Number=497-STM32G0B1CBT6-ND, Manufacturer 1=STMicroelectronics, Manufacturer Part Number 1=STM32G0B1CBT6
U5: library part CMP-00010-11, "CAN Transceiver, NXP", Digikey Part Number=568-8684-1-ND, Manufacturer 1="NXP USA Inc.", Manufacturer Part Number 1=TJA1051T/3,118
U6 U7: library part CMP-00085-1, "50mA Load Switch w/ Overcurrent Protection", Digikey Part Number=576-3964-1-ND, Manufacturer 1="Microchip Technology", Manufacturer Part Number 1=MIC2090-2YM5-TR
U8: library part CMP-00089-1, "2Kb I2C EEPROM", Digikey Part Number=497-8552-1-ND, Manufacturer 1=STMicroelectronics, Manufacturer Part Number 1=M24C02-WMN6TP
Y1: library part CMP-128-000000-3, "8MHz ±20ppm 18pF Crystal", Digikey Part Number=50-ECS-80-18-33-JGN-CT-ND, Manufacturer 1="ECS Inc.", Manufacturer Part Number 1=ECS-80-18-33-JGN-TR

## Free pads (board coordinates)
  round 200 hole 133.86: MH(150,150) MH(475,2350) MH(2350,150) MH(2350,2350)

## Via types
v1: diameter 19.68, hole 11.81, Top Copper to Bottom Copper, tented both sides, 89 vias
v2: diameter 30, hole 18, Top Copper to Bottom Copper, tented both sides, 8 vias
v3: diameter 30, hole 18, Top Copper to Bottom Copper, 6 vias

## Nets (pads, with @x,y where several pads share a name; then routed paths per layer and width w, separated by ;. In a path a pad name is that pad's centre, name@x,y a point inside that pad or via, vN(x,y) a via of type N, cw(c..) or ccw(c..) an arc to the next point about the centre after c; other vN are vias at no path point)
+3V3: C8.2 C9.2 C10.2 C11.2 C16.2 C28.2 FB1.1 J5.1 R12.1 R20.1 R21.2 R27.1 R28.2 R33.2 R34.2 TP8.1 U3.5 U4.4 U4.6 U5.5 U8.1 U8.2 U8.8 | length 979
  Top Copper w6: U4.6 1084.77,1260.95 1117.95,1260.95 1123,1266 1123,1292.49 1117.38,1298.1 1084.77,1298.1 U4.4
  Top Copper w8: v1(195,1445) R12.1 ; TP8.1@295,1845 TP8.1 377.5,1845.5 C8.2 ; v1(915,1345) C11.2 FB1.1 ; v1(956,1270) C9.2 C10.2 1030.38,1264.62 1043.38,1264.62 1048,1260 1083.5,1260 U4.6 ; v1(969,398) 969.25,398 997.25,370 R21.2 ; v1(1180,645) R20.1 ; R28.2 v1(1320,395) ; v1(1395,705) 1397.24,702.76 1397.24,690.26 1415,672.5 R27.1 ; U8.1 1967,1039 1990,1062 v1(1990,1064) 1965,1089 U8.2
  Top Copper w10: U5.5 1496.28,1816 C16.2 v1(1548,1791) ; R33.2 1549.5,1203.5 1578.5,1203.5 v1(1580,1202) 1580,1200.5 1599.5,1181 R34.2 ; v1(1686,983) 1686.5,982.5 1713.5,982.5 C28.2 1714,1034.15 U8.8
  other v2: 408,1778 367.74,1791.81 452,1792
+5V: C5.2 C6.2 C7.2 C15.2 D3.2 R11.1 R19.1 R26.1 TP7.1 TP12.1 U2.2 U2.4 U3.1 U3.3 U5.3 | length 4635.5
  Top Copper w8: U3.1 547,1853 521.69,1853 517,1857.69 517,1916 525,1924 549.2,1924 U3.3 ; TP7.1 705,1694 780.84,1769.84 U2.4
  Top Copper w10: R11.1 490,1650 550,1710 U3.1 ; R19.1 1200,575 1250,625 1340,625 1390,575 R26.1 ; U5.3 1442.39,1600.11 1442.39,1543.39 C15.2 v1(1465,1540) ; TP12.1 D3.2
  Top Copper w30: U3.1 C7.2 C6.2 C6.2@672,1848 ; U2.4@778.84,1848 U2.4 ; U2.2 1013.87,1848.72 1047.51,1848.72 1047.79,1849 1112,1849 C5.2 1123,1858 v2(1177,1858) ; v2(2145,1080) D3.2
  Top Copper w40: C6.2@672,1848 U2.4@778.84,1848 ; U2.4 U2.2
  Bottom Copper w30: v2(1177,1858) 1177,1828 v1(1465,1540) 1740,1540 2145,1135 2145,1025 2040,920 1585,920 1530,865 1530,642.57 1512.43,625 v1(1290,625)
+12V: C3.2 C4.2 TP6.1 U1.5 U2.3 | length 445.7
  Top Copper w8: C3.2 994.5,2106.97 999,2102.47 1024.47,2077 TP6.1
  Top Copper w20: U1.5 997.65,2220 999,2218.65 C3.2@999,2118 ; C3.2@999,2102.47 C4.2 999,1944.27 1006.72,1936.55 U2.3
ADC_IN2: C20.2 R22.2 R23.2 U4.13 | length 896.9
  Top Copper w8: R23.2 R22.2 452.5,845 527.5,920 1062,920 1095,953 C20.2 1095,1027.5 1115.5,1048 1127.68,1048 1141.73,1062.05 U4.13
ADC_IN3: C23.2 R24.2 R25.2 U4.14 | length 610.8
  Top Copper w8: R25.2 R24.2 802.5,845 842.5,885 1089,885 1157,953 1157,1019.31 1152.31,1024 1136,1024 C23.2 ; C23.2@1137.23,1025.27 1161,1049.04 1161,1083.24 U4.14
ADC_IN4: C24.2 R29.2 R30.2 U4.15 | length 743.5
  Top Copper w8: U4.15 1180.55,1083.11 1180.55,1025.55 C24.2 1196,1025 1203,1018 1203,950 1273,880 1662.5,880 1697.5,845 R29.2 R30.2
ADC_IN5: C27.2 R31.2 R32.2 U4.16 | length 1051
  Top Copper w8: U4.16 1200.79,1047.25 1223.04,1025 1245,1025 1251,1019 1251,965.04 1306.04,910 1982.5,910 2047.5,845 R31.2 R32.2
APPS_EN: U4.11 U6.3 | length 1035.9
  Top Copper w8: v1(878,842) 919,842 1062.6,698.4 U6.3 ; U4.11 1130.26,1161.42 1140.84,1172 v1(1144,1172)
  Bottom Copper w8: v1(878,842) 1047,1011 1047,1049 1107,1109 1107,1165.31 1113.69,1172 v1(1144,1172)
APPS_F\L\T\: R21.1 U4.12 U6.4 | length 1102.3
  Top Copper w8: v1(878,808) 878,449.5 R21.1@997.5,330 ; U4.12 1084.03,1141.37 1144.63,1141.37 v1(1145,1141)
  Top Copper w10: R21.1@997.5,330 R21.1 1000.39,330.39 1062.2,330.39 U6.4
  Bottom Copper w8: v1(878,808) 880.24,810.24 887.24,810.24 1074,997 1074,1038 1145,1109 v1(1145,1141)
APPS_PWR: C22.2 J7.3 J8.1 TP13.1 U6.5 | length 894.5
  Top Copper w10: J7.3 J8.1 800,260 815,245 1000,245 ; TP13.1@1000,197 1000,245 ; U6.5 1136.2,329.59 1136.2,276.2 C22.2 1135,250.86 1129.14,245 1000,245
BRAKE_LED: R13.1 U4.22 | length 1077.2
  Top Copper w8: R13.1 v1(1150,200) ; v1(1311,1031) 1311,1034.16 1318.9,1042.06 U4.22
  Bottom Copper w8: v1(1150,200) 1150,283 1037,396 1037,674 1311,948 v1(1311,1031)
BSE_EN: U4.17 U7.3 | length 1376.7
  Top Copper w8: v1(904,786) 930.74,786 1024,692.74 1024,413 1044,393 1167,393 1203.21,429.21 U7.3 ; v1(1220,1150) 1220.47,1149.53 U4.17
  Bottom Copper w8: v1(904,786) 1098,980 1098,1028 v1(1220,1150)
BSE_F\L\T\: R28.1 U4.18 U7.4 | length 1525.5
  Top Copper w8: v1(904,748) 904,504 1045,363 1175,363 1233,305 v1(1320,305) ; U4.18 1240.16,1126.95 1255,1141.8 v1(1255,1143)
  Top Copper w10: v1(1320,305) R28.1 1320.39,330.39 1377.2,330.39 U7.4
  Bottom Copper w8: v1(904,748) 1071,915 1232,915 1255,938 v1(1255,1143)
BSE_PWR: C26.2 J9.3 J10.1 TP15.1 U7.5 | length 726.8
  Top Copper w10: U7.5 1452.8,330.39 1509.61,330.39 C26.2 ; TP15.1 1500,295 1510,305 C26.2 ; J10.1 J9.3 1699.06,330.94 1510.94,330.94 C26.2
BTN_DEBUG: C19.2 SW3.3 SW3.4 U4.48 | length 299.5
  Top Copper w8: SW3.3 SW3.4 ; SW3.4@1086.32,1503.68 1110,1480 C19.2 1141.37,1479.63 1141.37,1416.7 U4.48
  Top Copper w10: SW3.4 SW3.4@1086.32,1503.68
CAN1_RX: U4.38 U5.4 | length 323.3
  Top Copper w8: U4.38 1338.58,1467.58 1362,1491 1471,1491 1505,1525 1505,1573.49 1495,1583.49 U5.4
CAN1_S: U4.37 U5.8 | length 761
  Top Copper w8: U5.8 v1(1345,1877) ; U4.37 1359,1417.07 1359,1454.31 1371.69,1467 1492,1467 1557,1532 v1(1557,1587)
  Bottom Copper w8: v1(1345,1877) 1345,1799 v1(1557,1587)
CAN1_TX: U4.39 U5.1 | length 197.2
  Top Copper w8: U4.39 1318.9,1563.9 1345,1590 U5.1
CAN_N: D2.1 J3.1 J4.2 SW1.6 U5.6 | length 1648.1
  Top Copper w6.5: D2.1 1445.34,2082.54 1443.81,2081 ; J4.2 1447.61,2300 ; SW1.6 1656.44,1775.14 1673.69,1775.14 1677.49,1771.33 1677.49,1764.1 1673.69,1760.29 1454.77,1760.29 1429.75,1785.31 1429.75,1790.69 1433.56,1794.5 1434.32,1794.5 1445,1805.18 U5.6 1445,1829.38 1434.32,1840.06 1433.56,1840.06 1429.75,1843.87 1429.75,1886.17 1472.58,1929 1484,1940.42 1484,2028.53 1443.81,2068.72 1443.81,2081 ; J3.1 1970.5,2300 1974.31,2303.81 1974.31,2324.33 1885.34,2413.29 1547.9,2413.29 1443.81,2309.19 1443.81,2303.81 1447.61,2300 ; 1443.81,2081 1443.81,2296.19 1447.61,2300
CAN_P: D2.2 J3.2 J4.1 SW1.2 U5.7 | length 1777.4
  Top Copper w6.5: J4.1 1420.5,2300 ; D2.2 1422.77,2082.54 1424.31,2081 ; SW1.2 1718.05,1775.14 1700.8,1775.14 1696.99,1771.33 1696.99,1756.02 1681.76,1740.79 1446.69,1740.79 1410.25,1777.23 1410.25,1790.69 1406.44,1794.5 1405.68,1794.5 1395,1805.18 U5.7 1395,1829.38 1405.68,1840.06 1406.44,1840.06 1410.25,1843.87 1410.25,1894.25 1464.5,1948.5 1464.5,2020.45 1424.31,2060.64 1424.31,2081 ; J3.2 1997.61,2300 1993.81,2303.81 1993.81,2332.4 1893.42,2432.79 1539.83,2432.79 1424.31,2317.27 1424.31,2303.81 1420.5,2300 ; 1420.5,2300 1424.31,2296.19 1424.31,2081
EEPROM_W\C\: U4.28 U8.7 | length 349
  Top Copper w8: U4.28 1416.55,1201 1465,1201 1577,1089 U8.7
FLT1_LED: R15.1 U4.24 | length 1765.4
  Top Copper w8: R15.1 v1(505,50) ; v1(1041,832) 1041,833 1056,848 1206,848 1244,810 v1(1285,810) ; U4.24 1358.27,1042.89 1367,1034.16 v1(1367,1031)
  Bottom Copper w8: v1(505,50) 506.84,51.84 526.84,51.84 620,145 840,145 860,165 860,664 1027.06,831.06 1040.06,831.06 v1(1041,832) ; v1(1285,810) 1367,892 v1(1367,1031)
FLT2_LED: R16.1 U4.25 | length 1705.4
  Top Copper w8: R16.1 v1(855,50) ; v1(1022.84,782) 1060.84,744 1369,744 v1(1435,810) ; U4.25 1459.27,1141.73 v1(1475,1126)
  Bottom Copper w8: v1(855,50) 880.31,50 888,57.69 888,649 1016.06,777.06 1017.89,777.06 v1(1022.84,782) ; v1(1435,810) 1475,850 v1(1475,1126)
FLT3_LED: R17.1 U4.26 | length 2295.9
  Top Copper w8: v1(1086,804) 1126,764 1342.16,764 1385,806.84 v1(1385,810) ; v1(1355,1162) 1355.58,1161.42 U4.26 ; v1(1645,50) R17.1
  Bottom Copper w8: v1(1086,804) 1086,803.31 912,629.31 912,203 1000,115 1495,115 1560,50 v1(1645,50) ; v1(1355,1162) 1355,1130 1420,1065 1420,845 v1(1385,810)
FLT4_LED: R18.1 U4.27 | length 2569.3
  Top Copper w8: v1(1136,819) 1170,785 1310,785 v1(1335,810) ; v1(1354,1193) 1357.16,1193 1369.06,1181.1 U4.27 ; v1(1995,50) R18.1
  Bottom Copper w8: v1(1136,819) 1133.76,816.76 1133.76,807.76 940,614 940,220 1015,145 1760,145 1855,50 v1(1995,50) ; v1(1335,810) 1393,868 1393,1051 1336.16,1107.84 1336.16,1175.16 v1(1354,1193)
GND: C1.1 C2.1 C3.1 C4.1 C5.1 C6.1 C7.1 C8.1 C9.1 C10.1 C11.1 C12.1 C13.2 C14.1 C15.1 C16.1 C17.1 C18.1 C19.1 C20.1 C21.1 C22.1 C23.1 C24.1 C25.1 C26.1 C27.1 C28.1 D2.3 D4.1 D5.C D6.C D7.C D8.C D9.C D10.C D11.C D12.C J1.1 J5.3 J5.5 J5.9 J6.5 J7.2 J8.2 J9.2 J10.2 R1.1 R3.1 R5.1 R23.1 R25.1 R30.1 R32.1 SW2.1 SW2.2 SW3.1 SW3.2 TP5.1 U1.1 U1.9 U2.1 U3.2 U4.7 U5.2 U6.2 U7.2 U8.3 U8.4 Y1.2 Y1.4 | length 3166.3
  Top Copper w8: v1(680,2375) C2.1 712.5,2372.5 777.5,2372.5 U1.1 ; v1(799,1060) 799.4,1060.4 824.84,1060.4 C14.1 825.23,1095.31 824.65,1095.89 824.65,1108.15 Y1.2 ; C13.2 887.23,1272.93 903.16,1288.86 v1(903.16,1290) 904.05,1290 919.05,1305 C11.1 ; Y1.4 897.98,1196.24 921.76,1196.24 v1(924,1194) ; SW3.1 SW3.2 1126.68,1588.32 1140,1575 v1(1140,1545) 1140.5,1544.5 1140.5,1520.5 C19.1 ; v1(956,1234) 958,1232 983,1232 C9.1 C10.1 1028.04,1230 1038.2,1240.16 U4.7 ; C12.1 v1(1025,1371) ; v1(1028.16,1025) C20.1 ; v1(1030,1085) C18.1 ; v1(1070,275) C22.1 ; v1(1135,960) C23.1 ; v1(1180,960) C24.1 ; v1(1225,960) C27.1 ; C28.1 C28.1@1754.5,981.5 ; v1@1779.5,981.5 v1(1780,981) ; U8.3 1963,1139 v1(1986,1162) 1986,1164 1961,1189 U8.4
  Top Copper w10: v1(84,1815) TP5.1 ; v1(145,1420) D6.C ; v1(145,1600) D5.C ; D9.C v1(520,100) ; U3.2 551.3,1888.7 608.7,1888.7 C7.1 609.5,1890.5 609.5,1912.67 619,1922.17 v1(619,1923) 620.85,1924.85 664.85,1924.85 C6.1 ; D10.C v1(866.16,100) ; U6.2 C21.1 ; D7.C v1(1200,225) ; D8.C v1(1325,225) ; v1(1375,1540) C15.1 1397,1542 1397,1600.72 U5.2 ; v1(1405,1997) 1406.23,1998.23 1432.77,1998.23 D2.3 ; U7.2 C25.1 ; C16.1 v1(1548,1882) ; v1(1615,100) D11.C ; v1(1626,2046) C17.1 ; C28.1@1754.5,981.5 v1@1779.5,981.5 ; v1(1965,100) D12.C ; D4.1 2148.9,1375 2223,1375 2249.18,1401.18 J6.5 ; J5.9 2375,1946 2392.5,1963.5 2392.5,1993.13 SW2.2 SW2.1
  Top Copper w18: J6.5 2310.35,1401.18 2342,1432.83 v2(2342,1436)
  Top Copper w20: C8.1 v2(378,1968) ; v1(400,780) R23.1 ; v1(457,2058) R1.1 ; v1(645,2300) R3.1 ; v1(712,2156) C1.1 ; v1(750,780) R25.1 ; C3.1 869.5,2088.94 894.5,2063.94 894.5,2059.5 933,2021 C4.1 ; U2.1 1011.61,1755 1061,1755 1079,1737 1120,1737 C5.1 ; R5.1 v1(1054,2385) ; C21.1 v1(1100,515) ; C25.1 v1(1415,515) ; C26.1 v1(1510,395) ; v1(1750,780) R30.1 ; v1(2100,780) R32.1
  Top Copper w30: C5.1 1124,1737 v2(1178,1737)
  other v1: 918,2036
  other v3: 855,2257 905,2257 855,2295 905,2295 855,2333 905,2333
I2C1_SCL: R34.1 U4.29 U8.6 | length 336.3
  Top Copper w8: U4.29 1480.53,1220.47 1560,1141 1596,1141 1597,1140 1717.85,1140 U8.6
I2C1_SDA: R33.1 U4.32 U8.5 | length 340
  Top Copper w8: U4.32 1471.53,1279.53 1506.06,1245 1552,1245 1590,1245 1645,1190 1717.85,1190 U8.5
NetC2_2: C2.2 U1.2 | length 76.2
  Top Copper w8: C2.2 714.27,2330.73 726.27,2330.73 736.74,2320.26 779.74,2320.26 U1.2
NetC13_1: C13.1 U4.8 Y1.1 | length 353.3
  Top Copper w5: Y1.1 Y1.1@825.23,1226.15
  Top Copper w8: Y1.1@825.23,1226.15 825.23,1244.23 ; C13.1 825.23,1244.23 ; U4.8 1049.47,1220.47 1033,1204 949,1204 903,1250 831,1250 825.23,1244.23
NetC14_2: C14.2 R6.1 Y1.3 | length 107.2
  Top Copper w8: C14.2 865.23,1096.3 Y1.3@882.08,1113.14 ; Y1.3@882.08,1117.37 884.45,1115 R6.1@929,1115
NetC17_2: C17.2 R9.2 R10.2 | length 90.3
  Top Copper w6.5: R10.2 1668.5,2000.5 1690,2000.5 ; C17.2 1690,2045 1690,2000.5 ; R9.2 1711.5,2000.5 1690,2000.5
NetC21_2: C21.2 R19.2 R20.2 U6.1 | length 241.9
  Top Copper w10: U6.1 1138.7,430.51 1138.7,483.7 C21.2 R19.2 R20.2
NetC25_2: C25.2 R26.2 R27.2 U7.1 | length 241.9
  Top Copper w10: U7.1 1453.7,430.51 1453.7,483.7 C25.2 R26.2 R27.2
NetD1_A: D1.A R4.2 | length 54.8
  Top Copper w8: D1.A 1105.46,2208.5 1116.96,2220 R4.2
NetD1_C: D1.C U1.6 | length 90.6
  Top Copper w8: U1.6 980.75,2270.75 1069.25,2270.75 D1.C
NetD5_A: D5.A R11.2 | length 54.8
  Top Copper w10: D5.A 146.5,1700 175,1700 180,1695 190,1695 R11.2
NetD6_A: D6.A R12.2 | length 54.8
  Top Copper w10: D6.A 146.5,1520 175,1520 180,1515 190,1515 R12.2
NetD7_A: D7.A R13.2 | length 54.8
  Top Copper w8: R13.2 1155,125 1170,125 1176.5,118.5 D7.A
NetD8_A: D8.A R14.2 | length 54.8
  Top Copper w8: D8.A 1348.5,118.5 1355,125 1370,125 R14.2
NetD9_A: D9.A R15.2 | length 54.8
  Top Copper w8: D9.A 418.5,76.5 424.62,70.38 424.62,55.38 R15.2
NetD10_A: D10.A R16.2 | length 54.8
  Top Copper w8: D10.A 768.5,71.5 774.62,65.38 774.62,55.38 R16.2
NetD11_A: D11.A R17.2 | length 54.8
  Top Copper w8: R17.2 1725.38,55.38 1725.38,70.38 1731.5,76.5 D11.A
NetD12_A: D12.A R18.2 | length 54.8
  Top Copper w8: R18.2 2075.38,55.38 2075.38,70.38 2080,75 2080,98.5 D12.A
NetJ1_2: J1.2 Q1.3 TP1.1 | length 419.8
  Top Copper w10: 361,2159 361,2084 381,2064 TP1.1
  Top Copper w25: J1.2 245,2275 361,2159 370,2150 Q1.3
NetJ7_1: J7.1 R22.1 | length 236.9
  Top Copper w8: J7.1 R22.1
NetJ8_3: J8.3 R24.1 | length 236.9
  Top Copper w8: J8.3 R24.1
NetJ9_1: J9.1 R29.1 | length 236.9
  Top Copper w8: J9.1 R29.1
NetJ10_3: J10.3 R31.1 | length 236.9
  Top Copper w8: J10.3 R31.1
NetQ1_1: Q1.1 R1.2 | length 52.9
  Top Copper w8: Q1.1 523,2111.84 R1.2@523,2060
NetR2_1: R2.1 R3.2 U1.3 | length 114.1
  Top Copper w8: R3.2 R2.1 728,2260 736,2268 778,2268 U1.3
NetR5_2: R5.2 U1.7 | length 74
  Top Copper w8: U1.7 R5.2
NetR6_2: R6.2 U4.9 | length 175.6
  Top Copper w8: R6.2@932.7,1157.31 936.31,1160.92 936.31,1172.31 954,1190 1042,1190 1052.06,1200.06 1082.93,1200.06 U4.9
NetR9_1: R9.1 SW1.3 | length 134.2
  Top Copper w6.5: SW1.3@1746,1901.51 SW1.3 1735.56,1890 1752,1906.44 R9.1
NetR10_1: R10.1 SW1.7 | length 116
  Top Copper w6.5: R10.1 1628,1902 SW1.7
NRST: C18.2 J5.10 SW2.3 SW2.4 U4.10 | length 2052.3
  Top Copper w8: v1(1000,1150) C18.2 1031.96,1150 1037.88,1155.92 1037.88,1165.88 1052.4,1180.4 1082.96,1180.4 U4.10 ; v1(1475,1390) 1680,1390 2140,1850 J5.10
  Top Copper w10: SW2.3 SW2.4 2307,1992.63 2307,1965 2325,1947 2325,1855 J5.10
  Bottom Copper w8: v1(1000,1150) 1000,1185 1205,1390 v1(1475,1390)
PEDAL_LED: R14.1 U4.23 | length 1218.2
  Top Copper w8: U4.23 1338.79,1083.45 1338.79,1031.21 v1(1339,1031) ; R14.1 v1(1375,200)
  Bottom Copper w8: v1(1339,1031) 1339,935 1066,662 1066,401 1267,200 v1(1375,200)
SWCLK: J5.4 U4.36 | length 1050.2
  Top Copper w8: U4.36 1698.27,1358.27 2040,1700 J5.4
SWDIO: J5.2 U4.35 | length 1037.7
  Top Copper w8: U4.35 1726.42,1338.58 2037.83,1650 J5.2
USB_N: D4.3 J6.2 U4.33 | length 920.7
  Top Copper w9.23: U4.33 1439.68,1299.21 1441.91,1301.44 1819.03,1301.44 1847.18,1329.59 2079.69,1329.59 ; D4.3 2080.6,1328.69 2079.69,1329.59 ; J6.2 2285.79,1328.62 2253.47,1328.62 2252.49,1329.59 2079.69,1329.59
USB_P: D4.2 J6.3 U4.34 | length 920.3
  Top Copper w9.23: U4.34 1439.68,1318.9 1441.91,1316.67 1812.73,1316.67 1840.88,1344.82 2079.69,1344.82 ; D4.2 2080.6,1345.72 2079.69,1344.82 ; J6.3 2285.79,1345.79 2253.47,1345.79 2252.49,1344.82 2079.69,1344.82
VIN: C1.2 Q1.2 R2.2 R4.1 TP2.1 U1.4 | length 899.5
  Top Copper w8: TP2.1 625,2187.4 ; v1(669,2220) 669,2259 R2.2 ; R4.1 v1(1120,2285)
  Top Copper w20: Q1.2 625,2187.4 636.4,2187.4 v1(669,2220) C1.2 ; C1.2@714.5,2220 U1.4
  Bottom Copper w8: v1(669,2220) 1055,2220 v1(1120,2285)
VREF: C12.2 FB1.2 U4.5 | length 109.2
  Top Copper w8: FB1.2 C12.2 1027.5,1305 1052.24,1280.26 1082.93,1280.26 U4.5
VUSB: D3.1 D4.4 J6.1 | length 407.4
  Top Copper w10: D4.4 2156,1298.22 2289.41,1298.22 J6.1
  Top Copper w17: J6.1 2290.32,1298.5 2313.5,1298.5 J6.1@2319,1293
  Top Copper w25: J6.1@2319,1293 2388.16,1223.84 D3.1@2388.16,1080.76
pads on no net: J1. J3. J4. J5.6 J5.7 J5.8 J6.4 J6.SH1 J6.SH2 J6.SH3 J7. J8. J9. J10. SW1.1 SW1.5 U1.8 U3.4 U4.1 U4.2 U4.3 U4.19 U4.20 U4.21 U4.30 U4.31 U4.40 U4.41 U4.42 U4.43 U4.44 U4.45 U4.46 U4.47

## Polygon pours and split planes (outlines as drawn)
+3V3 on Top Copper "+3V3_L01_P000" (solid, pour order 0): 351,1866 351,1759 471,1759 471,1780 471,1866
GND on Plane (GND) (split plane): 2407.84,2479.61 2415.61,2478.46 2423.22,2476.55 2430.61,2473.91 2437.71,2470.55 2444.44,2466.51 2450.75,2461.84 2456.57,2456.57 2461.84,2450.75 2466.51,2444.44 2470.55,2437.71 2473.91,2430.61 2476.55,2423.22 2478.46,2415.61 2479.61,2407.84 2479.97,2400.63 2479.9,2400 2479.9,100 2479.97,99.37 2479.61,92.16 2478.46,84.39 2476.55,76.78 2473.91,69.39 2470.55,62.29 2466.51,55.56 2461.84,49.25 2456.57,43.43 2450.75,38.16 2444.44,33.49 2437.71,29.45 2430.61,26.09 2423.22,23.45 2415.61,21.54 2407.84,20.39 2400.63,20.03 2400,20.1 100,20.1 99.37,20.03 92.16,20.39 84.39,21.54 76.78,23.45 69.39,26.09 62.29,29.45 55.56,33.49 49.25,38.16 43.43,43.43 38.16,49.25 33.49,55.56 29.45,62.29 26.09,69.39 23.45,76.78 21.54,84.39 20.39,92.16 20.03,99.37 20.1,100 20.1,2400 20.03,2400.63 20.39,2407.84 21.54,2415.61 23.45,2423.22 26.09,2430.61 29.45,2437.71 33.49,2444.44 38.16,2450.75 43.43,2456.57 49.25,2461.84 55.56,2466.51 62.29,2470.55 69.39,2473.91 76.78,2476.55 84.39,2478.46 92.16,2479.61 99.37,2479.97 100,2479.9 2400,2479.9 2400.63,2479.97
+3V3 on Plane (+3V3) (split plane): 2407.84,2479.61 2415.61,2478.46 2423.22,2476.55 2430.61,2473.91 2437.71,2470.55 2444.44,2466.51 2450.75,2461.84 2456.57,2456.57 2461.84,2450.75 2466.51,2444.44 2470.55,2437.71 2473.91,2430.61 2476.55,2423.22 2478.46,2415.61 2479.61,2407.84 2479.97,2400.63 2479.9,2400 2479.9,100 2479.97,99.37 2479.61,92.16 2478.46,84.39 2476.55,76.78 2473.91,69.39 2470.55,62.29 2466.51,55.56 2461.84,49.25 2456.57,43.43 2450.75,38.16 2444.44,33.49 2437.71,29.45 2430.61,26.09 2423.22,23.45 2415.61,21.54 2407.84,20.39 2400.63,20.03 2400,20.1 100,20.1 99.37,20.03 92.16,20.39 84.39,21.54 76.78,23.45 69.39,26.09 62.29,29.45 55.56,33.49 49.25,38.16 43.43,43.43 38.16,49.25 33.49,55.56 29.45,62.29 26.09,69.39 23.45,76.78 21.54,84.39 20.39,92.16 20.03,99.37 20.1,100 20.1,2400 20.03,2400.63 20.39,2407.84 21.54,2415.61 23.45,2423.22 26.09,2430.61 29.45,2437.71 33.49,2444.44 38.16,2450.75 43.43,2456.57 49.25,2461.84 55.56,2466.51 62.29,2470.55 69.39,2473.91 76.78,2476.55 84.39,2478.46 92.16,2479.61 99.37,2479.97 100,2479.9 2400,2479.9 2400.63,2479.97

## Silkscreen, mask and mechanical layers (free items; w line width, h text height)
Top Overlay:
  circle w10: c778,2419 r4.24
  circle w10: c550,1789 r4.24
  lines w5: 665,1180 665,1305 665,1435 ; 600,1435 535,1435 535,1305 730,1305 ; 600,1435 665,1435 ; 600,1435 600,1305 600,1180 730,1180 730,1305 ; 665,1435 730,1435 730,1305 ; 400,2082 400,2218 550,2218 550,2082 400,2082 ; 418,1815 418,1960 583,1960 583,1815 418,1815 ; 729,1705 729,1987 1063,1987 1063,1705 729,1705 ; 735,2191 735,2401 1025,2401 1025,2191 735,2191 ; 1312,1565 1312,1855 1528,1855 1528,1565 1312,1565 ; 1367,1966 1367,2116 1501,2116 1501,1966 1367,1966 ; 1666,1008 1666,1220 1958,1220 1958,1008 1666,1008 ; 2054,1274 2054,1399 2182,1399 2182,1274 2054,1274
  lines w8: 1200,575 1245,575 ; 1200,670 1230,670 ; 1340,575 1390,575 ; 1365,670 1395,670
  text "CANL CANH" at 1612,2462 h40 r180
  text "CANH CANL" at 2152,2462 h40 r180
  text "+12V GND" at 21,2372 h40 r270
  text "RST" at 2482,2023 h40 r90
  text "+5V" at 48,1732 h40 r270
  text "SWD" at 2482,1698 h40 r90
  text "+3V3" at 48,1552 h40 r270
  text "SAE @ UIC" at 225.24,1313.69 h60.87 r270
  text "Ephren Manning" at 91.33,1305 h40 r270
  text "USB" at 2482,1303 h40 r90
  text "Designed by" at 155.33,1248 h40 r270
  text "3V3" at 1243,653 h40
  text "5V" at 1258,558 h40
  text "A1" at 312,543 h40 r90
  text "B1" at 1813,543 h40
  text "B2" at 2193,543 h40
  text "A2" at 687,538 h40 r90
  text "GND" at 573,428 h40
  text "GND" at 1823,428 h40
  text "PWR" at 573,308 h40
  text "PWR" at 1823,308 h40
  text "B" at 1222,38 h40
  text "P" at 1285,37 h40